# EAGLE board 32blit (EAGLE 9.6.2)
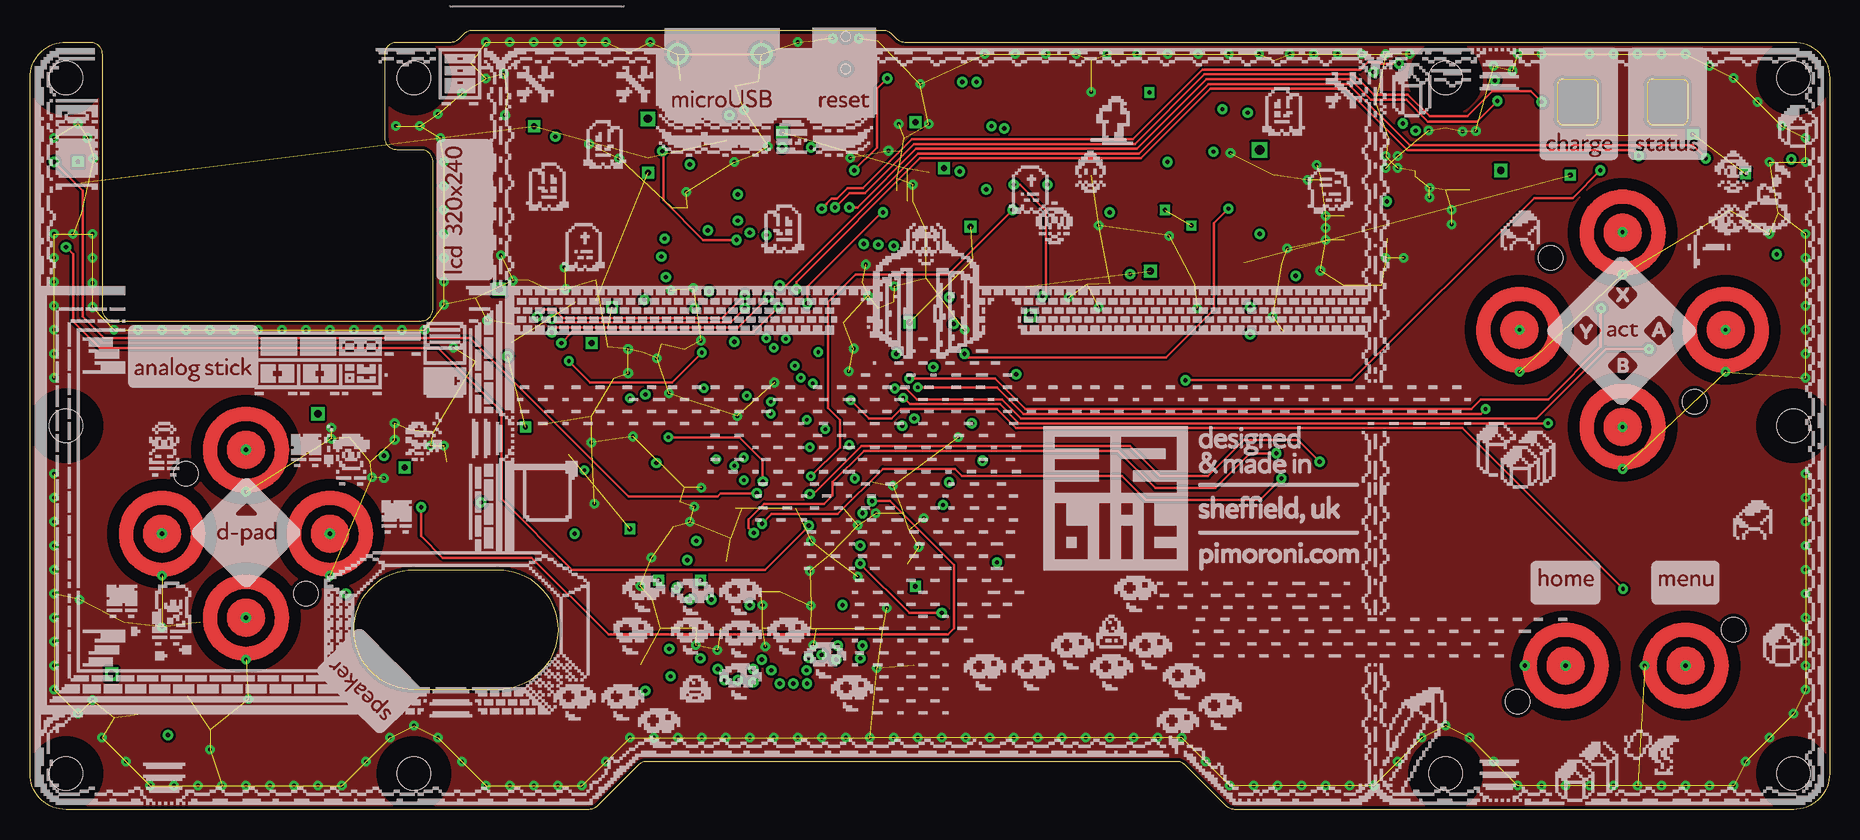
[diagram p0: board, top side]
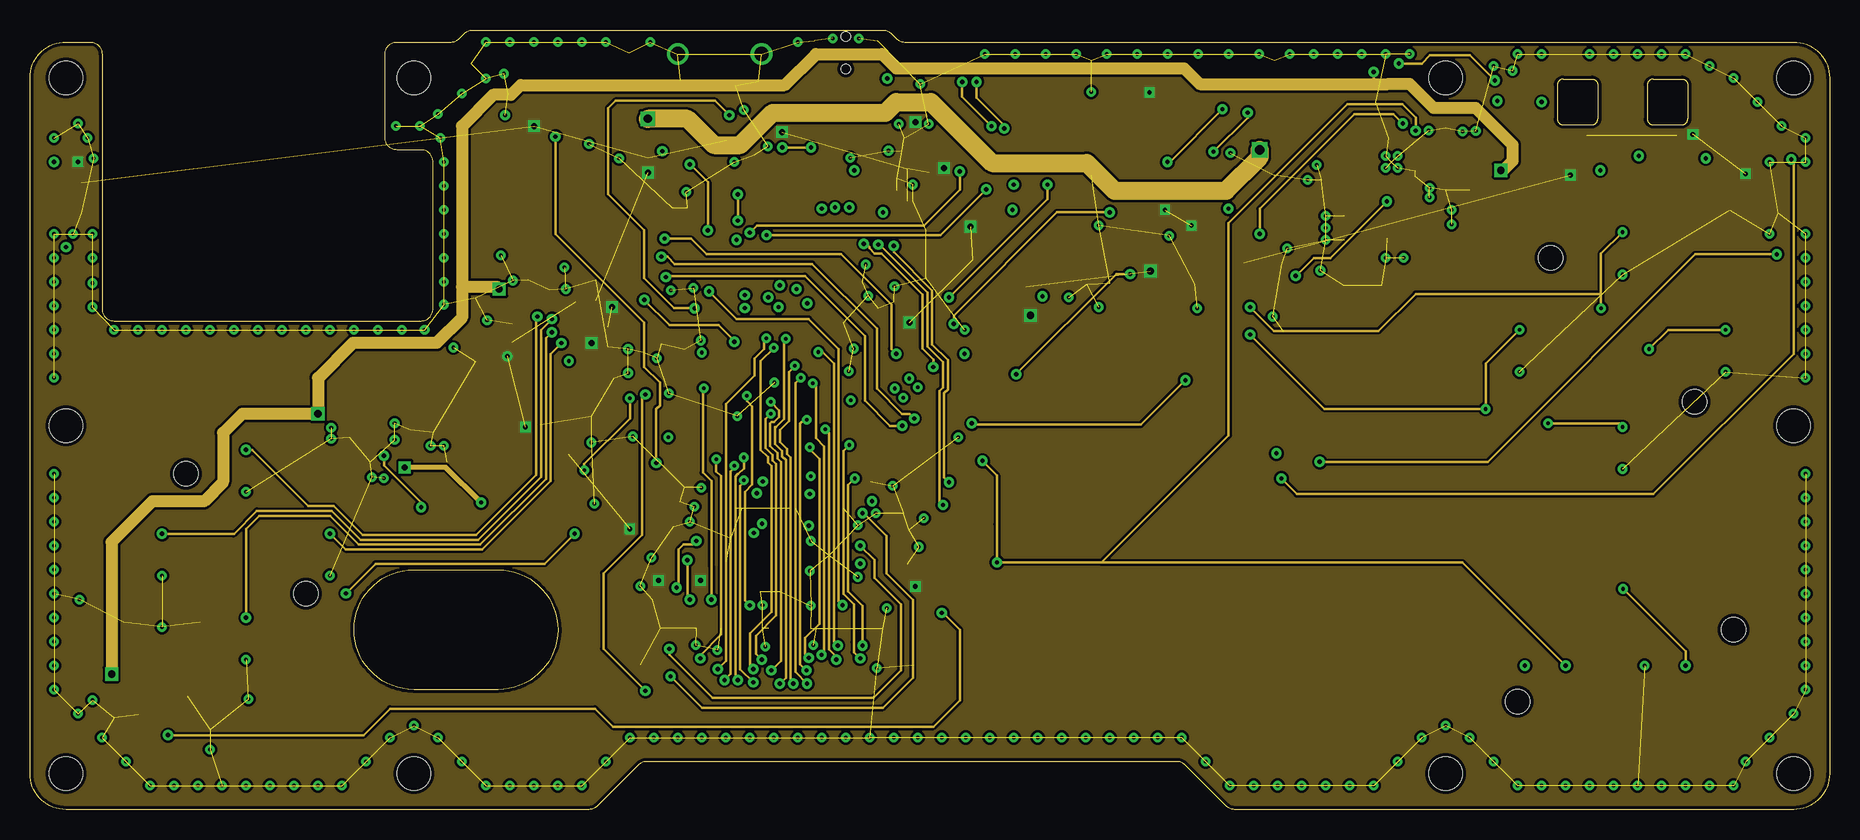
[diagram p1: board, inner layer Route2]
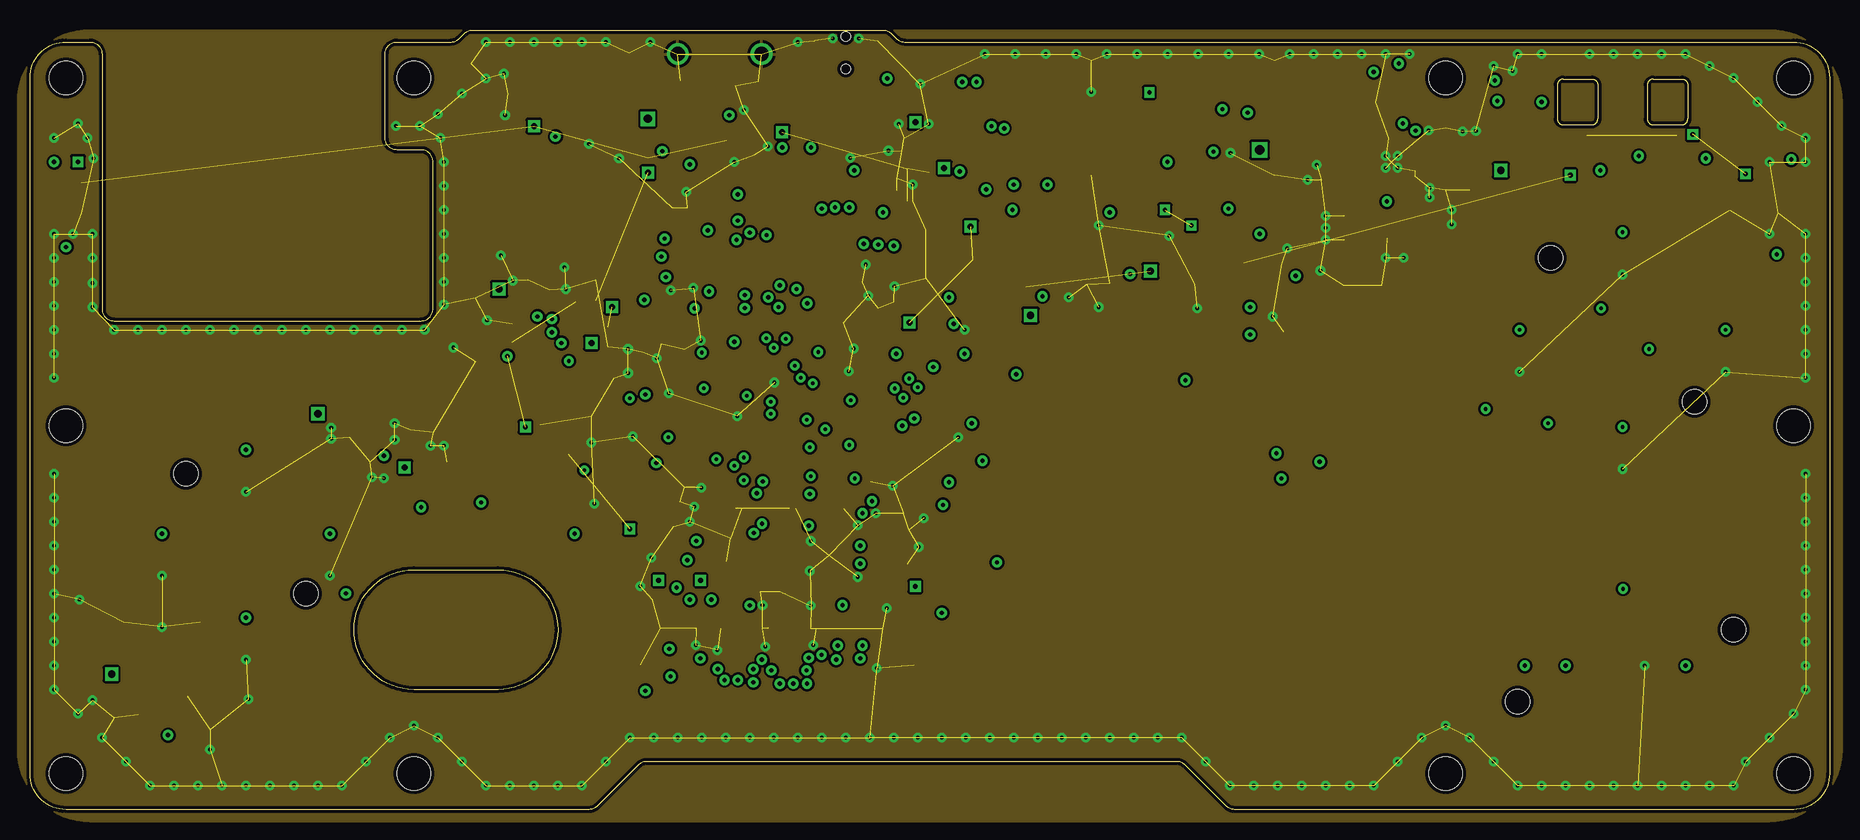
[diagram p2: board, inner layer Route15]
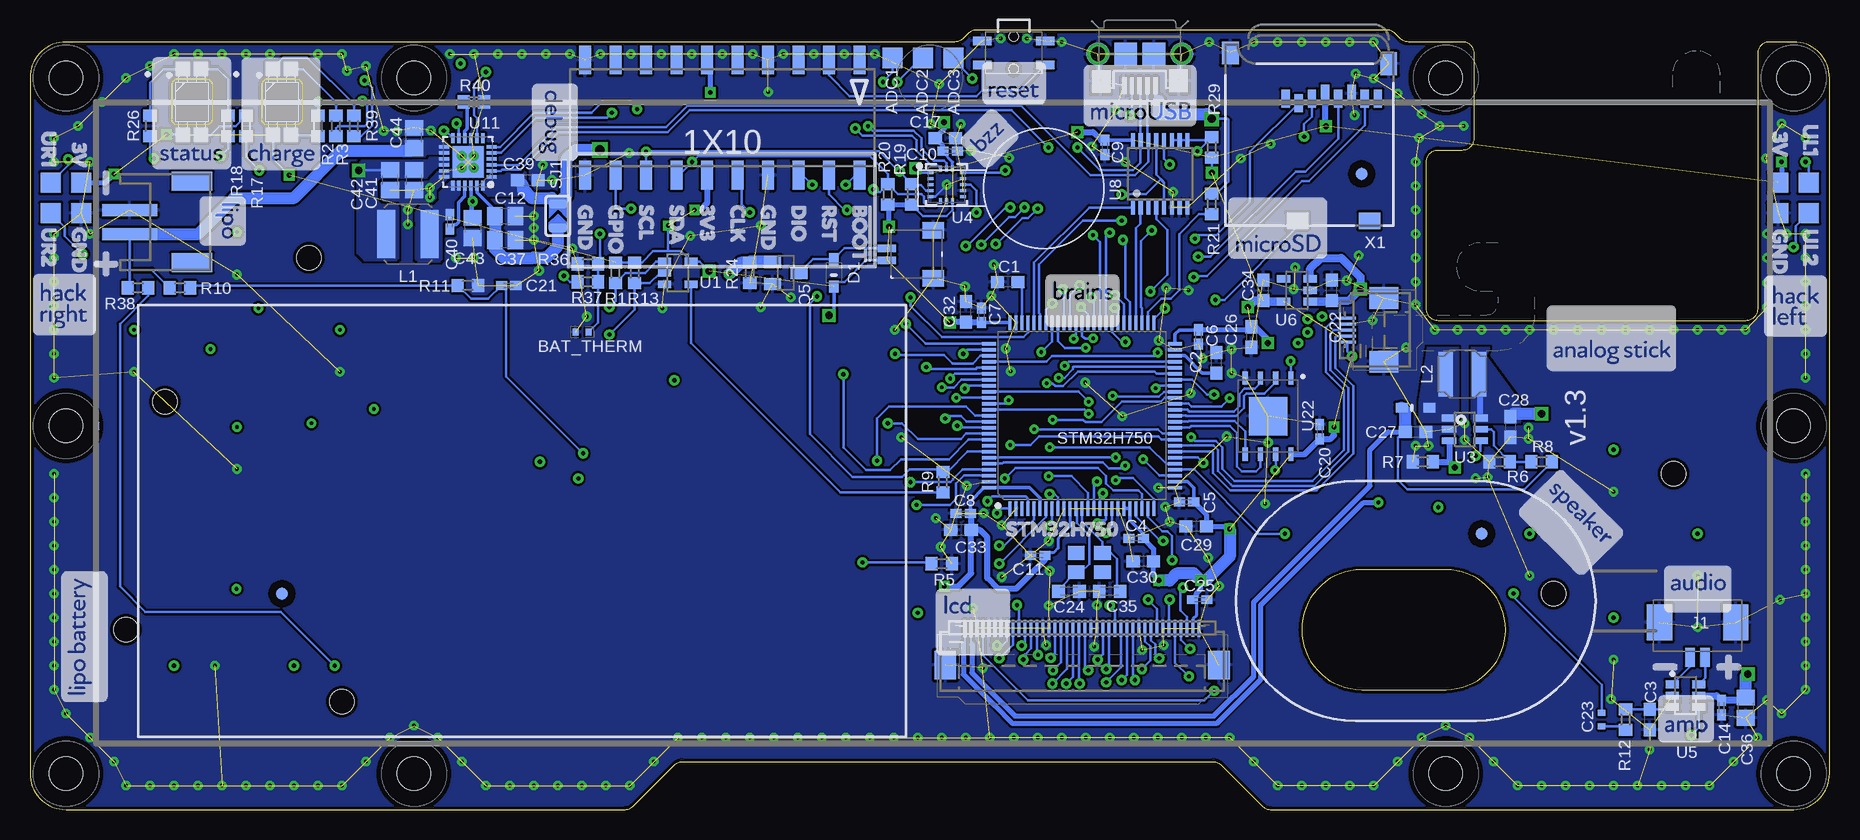
[diagram p3: board, bottom side, seen from below]

Size 150 x 65 mm. Coordinates in mm from the lower left corner, seen from the top.
Outline: 150,61 150,3 arc-90 147,0 100.41,0 arc-45 99.71,0.29 96.29,3.71 arc45 95.59,4 51.41,4 arc45 50.71,3.71 47.29,0.29 arc-45 46.59,0 3,0 arc-90 0,3 0,61 arc-90 3,64 5,64 arc-90 6,63 6,41.75 arc90 7,40.75 32.6,40.75 arc90 33.6,41.75 33.6,54 arc90 32.6,55 30.6,55 arc-90 29.6,56 29.6,63 arc-90 30.6,64 35.09,64 arc45 35.79,64.29 36.21,64.71 arc-45 36.91,65 71.09,65 arc-45 71.79,64.71 72.21,64.29 arc45 72.91,64 147,64 arc-90 150,61
Outline: 39,20 arc-90 44,15 arc-90 39,10 32,10 arc-90 27,15 arc-90 32,20 39,20
Copper layers ((1*2*15*16)): Top 0.035mm / dielectric 1.5mm / Route2 0.035mm / dielectric 0.15mm / Route15 0.035mm / dielectric 0.2mm / Bottom 0.035mm
Design rules "pimoroni-4layer *": minimum track width 0.2mm, minimum drill 0.3mm, track to track 0.2mm, track to pad 0.2mm, pad to pad 0.2mm, via to via 0.2mm, smd to smd 0.15mm, copper to edge 0.3mm, drill to drill 0.15mm, minimum pad ring 0.3mm, minimum via ring 0.25mm, stop-mask expansion 0.05mm, vias tented up to drill 99mm, thermal gap 0.25mm

## Footprints (pad centres in the part's own frame; a part is rotated, then mirrored left to right if it is on the bottom)
ABXY = smd 0.5 x 0.5: A 8.6,0; B 0,-8.1; GND1 -8.6,-3.5; GND2 8.6,-3.5; GND3 0,4.6; GND4 0,-11.6; X 0,8.1; Y -8.6,0 | hole 2: -6,6; 6,-6
TP17SQ = smd 1.7 x 1.7: TP 0,0
0402@1 = smd 0.5 x 0.6: 1 -0.55,0; 2 0.55,0
C0603 = smd 1.1 x 1: 1 -0.85,0; 2 0.85,0
C0402K = smd 0.925 x 0.74: 1 -0.6,0; 2 0.6,0
C0805 = smd 1.3 x 1.5: 1 -0.85,0; 2 0.85,0
0402 = smd 0.5 x 0.6: 1 -0.55,0; 2 0.55,0
C0603K = smd 1.05 x 1.08: 1 -0.875,0; 2 0.875,0
JST-PH-2-SMT-RA = smd 1 x 4.6: 1 1,-3.7; 2 -1,-3.7 | smd 1.6 x 3.4: NC1 -3.4,1.5; NC2 3.4,1.5
SOD-323 = smd 1 x 0.8: A 1.15,0; C -1.15,0
NSR0530HT1G = smd 1 x 0.8: A 1.15,0; C -1.15,0
DPAD = smd 0.5 x 0.5: DOWN 0,-7; GND1 -7,-3.5; GND2 7,-3.5; GND3 0,3.5; GND4 0,-10.5; LEFT -7,0; RIGHT 7,0; UP 0,7 | hole 2: -5,5; 5,-5
FPC-0.5MM-40WAY = smd 0.25 x 1.4: 1 9.75,0.7; 2 9.25,0.7; 3 8.75,0.7; 4 8.25,0.7; 5 7.75,0.7; 6 7.25,0.7; 7 6.75,0.7; 8 6.25,0.7; 9 5.75,0.7; 10 5.25,0.7; 11 4.75,0.7; 12 4.25,0.7; 13 3.75,0.7; 14 3.25,0.7; 15 2.75,0.7; 16 2.25,0.7; 17 1.75,0.7; 18 1.25,0.7; 19 0.75,0.7; 20 0.25,0.7; 21 -0.25,0.7; 22 -0.75,0.7; 23 -1.25,0.7; 24 -1.75,0.7; 25 -2.25,0.7; 26 -2.75,0.7; 27 -3.25,0.7; 28 -3.75,0.7; 29 -4.25,0.7; 30 -4.75,0.7; 31 -5.25,0.7; 32 -5.75,0.7; 33 -6.25,0.7; 34 -6.75,0.7; 35 -7.25,0.7; 36 -7.75,0.7; 37 -8.25,0.7; 38 -8.75,0.7; 39 -9.25,0.7; 40 -9.75,0.7 | smd 1.8 x 2.4: MT1 -11.4,-2.35; MT2 11.4,-2.35
PICOBLADE_1.25MM_2P = smd 0.8 x 1.6: 1 -0.625,0.8; 2 0.625,0.8 | smd 2.1 x 3: MT1 -3.175,-2.1; MT2 3.175,-2.1
JST_SH_1.0MM_2P = smd 0.6 x 1.55: 1 -0.5,4.775; 2 0.5,4.775 | smd 1.4 x 1.8: MT1 -2,0.9; MT2 2,0.9
FPC-0.5MM-05WAY = smd 0.25 x 1.4: 1 1,0.7; 2 0.5,0.7; 3 0,0.7; 4 -0.5,0.7; 5 -1,0.7 | smd 1.8 x 2.4: MT1 -2.65,-2.35; MT2 2.65,-2.35
1X10_FEMALE_SMT_RIGHT_ANGLE = smd 1 x 2.4: A1 -11.43,4.8; A2 -8.89,4.8; A3 -6.35,4.8; A4 -3.81,4.8; A5 -1.27,4.8; A6 1.27,4.8; A7 3.81,4.8; A8 6.35,4.8; A9 8.89,4.8; A10 11.43,4.8; B1 -11.43,-4.8; B2 -8.89,-4.8; B3 -6.35,-4.8; B4 -3.81,-4.8; B5 -1.27,-4.8; B6 1.27,-4.8; B7 3.81,-4.8; B8 6.35,-4.8; B9 8.89,-4.8; B10 11.43,-4.8
NRS5030 = smd 1.5 x 4: 1 -1.8,0; 2 1.8,0
NR4018 = smd 1.2 x 3.7: 1 -1.4,0; 2 1.4,0
SOT23 = smd 1 x 1.4: 1 -0.95,-1.1; 2 0.95,-1.1; 3 0,1.1
R0603 = smd 1 x 1.1: 1 -0.85,0; 2 0.85,0
LED-6028_REVERSE_RGB = smd 1.2 x 1.2: 1 -2.75,-0.75; 2 2.75,-0.75; 3 2.75,0.75; 4 -2.75,0.75
SOLDERJUMPER_ARROW_NOPASTE = smd 0.762 x 1.524: 1 -1.016,0; 2 1.016,0
LQFP-100 = smd 0.26 x 1.2: 1 -6,-7.75; 2 -5.5,-7.75; 3 -5,-7.75; 4 -4.5,-7.75; 5 -4,-7.75; 6 -3.5,-7.75; 7 -3,-7.75; 8 -2.5,-7.75; 9 -2,-7.75; 10 -1.5,-7.75; 11 -1,-7.75; 12 -0.5,-7.75; 13 0,-7.75; 14 0.5,-7.75; 15 1,-7.75; 16 1.5,-7.75; 17 2,-7.75; 18 2.5,-7.75; 19 3,-7.75; 20 3.5,-7.75; 21 4,-7.75; 22 4.5,-7.75; 23 5,-7.75; 24 5.5,-7.75; 25 6,-7.75; 51 6,7.75; 52 5.5,7.75; 53 5,7.75; 54 4.5,7.75; 55 4,7.75; 56 3.5,7.75; 57 3,7.75; 58 2.5,7.75; 59 2,7.75; 60 1.5,7.75; 61 1,7.75; 62 0.5,7.75; 63 0,7.75; 64 -0.5,7.75; 65 -1,7.75; 66 -1.5,7.75; 67 -2,7.75; 68 -2.5,7.75; 69 -3,7.75; 70 -3.5,7.75; 71 -4,7.75; 72 -4.5,7.75; 73 -5,7.75; 74 -5.5,7.75; 75 -6,7.75 | smd 1.2 x 0.26: 26 7.75,-6; 27 7.75,-5.5; 28 7.75,-5; 29 7.75,-4.5; 30 7.75,-4; 31 7.75,-3.5; 32 7.75,-3; 33 7.75,-2.5; 34 7.75,-2; 35 7.75,-1.5; 36 7.75,-1; 37 7.75,-0.5; 38 7.75,0; 39 7.75,0.5; 40 7.75,1; 41 7.75,1.5; 42 7.75,2; 43 7.75,2.5; 44 7.75,3; 45 7.75,3.5; 46 7.75,4; 47 7.75,4.5; 48 7.75,5; 49 7.75,5.5; 50 7.75,6; 76 -7.75,6; 77 -7.75,5.5; 78 -7.75,5; 79 -7.75,4.5; 80 -7.75,4; 81 -7.75,3.5; 82 -7.75,3; 83 -7.75,2.5; 84 -7.75,2; 85 -7.75,1.5; 86 -7.75,1; 87 -7.75,0.5; 88 -7.75,0; 89 -7.75,-0.5; 90 -7.75,-1; 91 -7.75,-1.5; 92 -7.75,-2; 93 -7.75,-2.5; 94 -7.75,-3; 95 -7.75,-3.5; 96 -7.75,-4; 97 -7.75,-4.5; 98 -7.75,-5; 99 -7.75,-5.5; 100 -7.75,-6
TACT_RIGHT_ANGLE_LOW_PROFILE = smd 1.55 x 0.7: 1 -2.625,1; 2 2.625,1; 3 -2.625,-1; 4 2.625,-1 | hole 0.8: 0,1.35; 0,-1.35
SOT-23-5 = smd 0.65 x 1.1: 1 0.95,1.1; 2 0,1.1; 3 -0.95,1.1; 4 -0.95,-1.1; 5 0.95,-1.1
SOT23-6L = smd 0.55 x 1.2: 1 -0.95,-1.3; 2 0,-1.3; 3 0.95,-1.3; 4 0.95,1.3; 5 0,1.3; 6 -0.95,1.3
LGA16_3X3MM = smd 0.5 x 0.25: 1 -1.35,1; 2 -1.35,0.5; 3 -1.35,0; 4 -1.35,-0.5; 5 -1.35,-1; 9 1.35,-1; 10 1.35,-0.5; 11 1.35,0; 12 1.35,0.5; 13 1.35,1 | smd 0.25 x 0.5: 6 -0.5,-1.35; 7 0,-1.35; 8 0.5,-1.35; 14 0.5,1.35; 15 0,1.35; 16 -0.5,1.35
SOT-23-6 = smd 0.65 x 1.1: 1 0.95,1.1; 2 0,1.1; 3 -0.95,1.1; 4 -0.95,-1.1; 5 0,-1.1; 6 0.95,-1.1
TSSOP-16-TI = smd 1.2 x 0.35: 1 -2.808,2.275; 2 -2.808,1.625; 3 -2.808,0.975; 4 -2.808,0.325; 5 -2.808,-0.325; 6 -2.808,-0.975; 7 -2.808,-1.625; 8 -2.808,-2.275; 9 2.795,-2.275; 10 2.795,-1.625; 11 2.795,-0.975; 12 2.795,-0.325; 13 2.795,0.325; 14 2.795,0.975; 15 2.795,1.625; 16 2.795,2.275
QFN50P400X400X100-25N = smd 0.813 x 0.305: 1 -1.981,1.245; 2 -1.981,0.762; 3 -1.981,0.254; 4 -1.981,-0.254; 5 -1.981,-0.762; 6 -1.981,-1.245; 13 1.981,-1.245; 14 1.981,-0.762; 15 1.981,-0.254; 16 1.981,0.254; 17 1.981,0.762; 18 1.981,1.245 | smd 0.305 x 0.813: 7 -1.245,-1.981; 8 -0.762,-1.981; 9 -0.254,-1.981; 10 0.254,-1.981; 11 0.762,-1.981; 12 1.245,-1.981; 19 1.245,1.981; 20 0.762,1.981; 21 0.254,1.981; 22 -0.254,1.981; 23 -0.762,1.981; 24 -1.245,1.981 | smd 2.591 x 2.591: 25 -0.025,0
DFN-8_6X5MM = smd 1.1 x 0.45: 1 -3.175,1.905; 2 -3.175,0.635; 3 -3.175,-0.635; 4 -3.175,-1.905; 5 3.175,-1.905; 6 3.175,-0.635; 7 3.175,0.635; 8 3.175,1.905 | smd 3.2 x 3.2: PAD 0,0
MICROB-USB = smd 0.35 x 1.4: DM -0.65,2.65; DP 0,2.65; GND 1.3,2.65; ID 0.65,2.65; VBUS -1.3,2.65 | smd 1.546 x 1.9: SH1 -3.251,2.235; SH2 3.226,2.286 | drill 1.2 pad 1.6: SH3 3.48,0; SH8 -3.505,0 | smd 1.9 x 1.9: SH4 3.48,0; SH5 1.168,0; SH6 -1.194,0; SH7 -3.505,0
2.7MM-MOUNTING-HOLE = hole 2.75: 0,0
FIDUCIAL-1MM = smd 1 x 1: 1 0,0
MENU-HOME = smd 0.5 x 0.5: GND3 0,1.6; GND4 0,-8.4; HOME 0,-5; MENU 0,5 | hole 2: -3,9; 3,-9
TSX-3225 = smd 1.4 x 1.15: 1 -1.1,-0.8; 2 1.1,-0.8; 3 1.1,0.8; 4 -1.1,0.8
MICROSD = smd 0.7 x 1.5: 1 9,-10.64; 2 7.9,-10.24; 3 6.8,-10.64; 4 5.7,-11.04; 5 4.6,-10.64; 6 3.5,-11.04; 7 2.4,-10.64; 8 1.3,-10.64 | smd 1.8 x 1.4: CD1 2,-0.44; CD2 8,-0.44 | smd 1.4 x 1.9: MT1 0.4,-13.54; MT2 13.6,-14.44

## Placement (x,y rotation side)
ABXY  ABXY  [ABXY]  132.75,40 0 top
ADC1  TPTP17SQ  [TP17SQ]  78.11,62.66 270 bottom
ADC2  TPTP17SQ  [TP17SQ]  75.56,62.66 270 bottom
ADC3  TPTP17SQ  [TP17SQ]  73.03,62.66 270 bottom
BAT_THERM  NTCG103JF103FT1  [0402@1]  103.97,39.82 0 bottom
C1  2.2uF  [C0603]  68.5,44 180 bottom
C2  2.2uF  [C0603]  51.1,37.25 90 bottom
C3  100pF  [C0603]  15,7.5 270 bottom
C4  100nF  [C0402K]  57.8,22.6 180 bottom
C5  100nF  [C0402K]  53.6,25.65 180 bottom
C6  100nF  [C0402K]  52.6,39.4 270 bottom
C7  100nF  [C0402K]  70.7,41.2 90 bottom
C8  100nF  [C0402K]  72.2,24.7 180 bottom
C9  100nF  [C0402K]  60.4,55.2 270 bottom
C10  100nF  [C0402K]  73.3,54.9 0 bottom
C11  100nF  [C0402K]  66,21.2 180 bottom
C12  10uF  [C0805]  110.4,49.5 0 bottom
C14  100nF  [C0402K]  9,8.5 270 bottom
C17  2.2uF  [C0603]  73.7,56 0 bottom
C20  100nF  [C0402K]  42.5,31.5 90 bottom
C21  100nF  [C0402K]  110.1,43.7 0 bottom
C22  1uF  [C0603]  41.5,43.3 90 bottom
C23  100nF  [0402]  19,7.5 90 bottom
C24  10pF  [C0603K]  63.4,18.2 180 bottom
C25  100nF  [C0402K]  52.5,17.5 0 bottom
C26  1uF  [C0603]  48.2,39.4 270 bottom
C27  1uF 25V  [C0603]  34.5,31.5 0 bottom
C28  1uF  [C0603]  26.6,31.9 270 bottom
C29  1uF  [C0603]  52.8,23.6 180 bottom
C30  1uF  [C0603]  57.2,20.7 180 bottom
C32  1uF  [C0603]  72,41.5 90 bottom
C33  1uF  [C0603]  72.4,23.3 180 bottom
C34  1uF  [C0603]  47.2,43.3 90 bottom
C35  10pF  [C0603K]  60,18.2 0 bottom
C36  10uF  [C0805]  7,8.5 270 bottom
C37  10uF  [C0805]  110.4,47.5 0 bottom
C39  1uF  [C0603]  108.5,52.5 0 bottom
C40  100nF  [C0402K]  115,49 270 bottom
C41  10uF  [C0805]  118,52.5 270 bottom
C42  10uF  [C0805]  120,52.5 270 bottom
C43  10uF  [C0805]  113.1,48.5 270 bottom
C44  10uF  [C0805]  118,56 90 bottom
CN1  LIPO BATTERY  [JST-PH-2-SMT-RA]  138,49 270 bottom
D1  NSR0530HT1G  [SOD-323]  83,44.75 90 bottom
D2  NSR0530HT1G  [NSR0530HT1G]  34.5,33.5 0 bottom
DPAD  DPAD  [DPAD]  18,23 0 top
FPC2  FPC-40WAY0.5  [FPC-0.5MM-40WAY]  62.3,14.4 0 bottom
J1  1X02PICOBLADE  [PICOBLADE_1.25MM_2P]  11,13.5 180 bottom
J3  1X02JST_SH  [JST_SH_1.0MM_2P]  73.8,46.3 90 bottom
JOYSTICK  FLIP_TYPE_0.5_5P  [FPC-0.5MM-05WAY]  39.5,40 90 bottom
JP1  10-WAY  [1X10_FEMALE_SMT_RIGHT_ANGLE]  92.3,57.7 0 bottom
L1  NRS5030T1R0NMGJ  [NRS5030]  118.5,48 180 bottom
L2  NR4018T4R7M  [NR4018]  30.6,36.3 180 bottom
Q5  DMN3023L  [SOT23]  87,44.75 270 bottom
R1  100k  [R0603]  101.2,44.75 90 bottom
R2  1k  [R0603]  126,57 270 bottom
R3  1k  [R0603]  124.5,57 90 bottom
R5  10k  [R0603]  74,20.5 0 bottom
R6  47K  [R0603]  27.5,29 0 bottom
R7  13.7R  [R0603]  33.9,29 0 bottom
R8  20K  [R0603]  24,29 0 bottom
R9  1k  [R0603]  73.9,27.3 90 bottom
R10  1M  [R0603]  137.5,43.5 0 bottom
R11  1M  [R0603]  113.5,43.7 0 bottom
R12  430k  [R0603]  17,7.5 90 bottom
R13  100k  [R0603]  99.6,44.75 90 bottom
R17  1k  [R0603]  132,57 270 bottom
R18  1k  [R0603]  133.5,57 270 bottom
R19  10k  [R0603]  76.5,51.3 270 bottom
R20  10k  [R0603]  78.5,51.3 270 bottom
R21  10k  [R0603]  51.5,50.5 270 bottom
R24  100k  [R0603]  90,44.75 270 bottom
R26  1k  [R0603]  140,57 270 bottom
R29  100k  [R0603]  51.5,55.2 270 bottom
R36  39k  [R0603]  103.5,45.5 0 bottom
R37  4k7  [R0603]  103.5,44 180 bottom
R38  4k7  [R0603]  141,43.5 180 bottom
R39  1k  [R0603]  123,57 270 bottom
R40  390R  [R0603]  113,59 180 bottom
RGB1  LED_RGB_4P6028_REVERSE  [LED-6028_REVERSE_RGB]  129,59 270 bottom
RGB2  LED_RGB_4P6028_REVERSE  [LED-6028_REVERSE_RGB]  136.5,59 270 bottom
SJ1  [SOLDERJUMPER_ARROW_NOPASTE]  106,49.5 90 bottom
STM32H750  [LQFP-100]  62.31,32.84 0 bottom
SWRESET  LY-A03-02  [TACT_RIGHT_ANGLE_LOW_PROFILE]  68,63.1 180 bottom
U1  SN74AHC1G02  [SOT-23-5]  96,44.75 90 bottom
U3  AP3031KTR-G1 - ref 200mV  [SOT23-6L]  30.4,31.7 270 bottom
U4  [LGA16_3X3MM]  73.6,52.1 0 bottom
U5  PAM8301  [SOT-23-6]  12,9.5 90 bottom
U6  AP2112  [SOT-23-5]  44.4,43.3 270 bottom
U8  74VHC4053AFT  [TSSOP-16-TI]  55.8,53 90 bottom
U11  BQ24295  [QFN50P400X400X100-25N]  113.5,54 180 bottom
U22  MT25QL256ABA1EW7-0SIT  [DFN-8_6X5MM]  46.8,32.8 270 bottom
U$2  [LRA_ELV1030AC1]  65.5,51.8 180 bottom
U$3  FCI 10118193-0001LF  [MICROB-USB]  57.5,63 180 bottom
U$6  [2.7MM-MOUNTING-HOLE]  3,61 0 top
U$7  [LCD_035]  75,0 0 top
U$8  [2.7MM-MOUNTING-HOLE]  32,61 0 top
U$9  [2.7MM-MOUNTING-HOLE]  118,61 0 top
U$10  [2.7MM-MOUNTING-HOLE]  147,61 0 top
U$11  [2.7MM-MOUNTING-HOLE]  147,3 0 top
U$12  [2.7MM-MOUNTING-HOLE]  118,3 0 top
U$13  [2.7MM-MOUNTING-HOLE]  32,3 0 top
U$14  [2.7MM-MOUNTING-HOLE]  3,3 0 top
U$15  [3020_SPEAKER]  34.5,17.4 0 bottom
U$16  [2.7MM-MOUNTING-HOLE]  3,32 0 top
U$17  FIDUCIAL1MM  [FIDUCIAL-1MM]  29,23 0 bottom
U$18  HOME-MENU  [MENU-HOME]  133,12 270 top
U$19  ABM8G-12.000MHZ-4Y-T3  [TSX-3225]  61.7,20.6 180 bottom
U$20  [2.7MM-MOUNTING-HOLE]  147,32 0 top
U$21  [JOYSTICK_ANALOG]  18.1,51.25 0 top
U$22  FIDUCIAL1MM  [FIDUCIAL-1MM]  39,53 0 bottom
U$23  FIDUCIAL1MM  [FIDUCIAL-1MM]  129,18 0 bottom
USER_3V3_1  TPTP17SQ  [TP17SQ]  4.27,52.27 0 bottom
USER_3V3_2  TPTP17SQ  [TP17SQ]  145.73,52.27 0 bottom
USER_GND_1  TPTP17SQ  [TP17SQ]  4.27,49.73 0 bottom
USER_GND_2  TPTP17SQ  [TP17SQ]  145.73,49.73 0 bottom
USER_LEFT1  TPTP17SQ  [TP17SQ]  1.73,52.27 0 bottom
USER_LEFT2  TPTP17SQ  [TP17SQ]  1.73,49.73 0 bottom
USER_RIGHT1  TPTP17SQ  [TP17SQ]  148.27,52.27 0 bottom
USER_RIGHT2  TPTP17SQ  [TP17SQ]  148.27,49.73 0 bottom
X1  MicroSD  [MICROSD]  36.35,48.65 180 bottom

## Library data of the parts
ABXY DPAD SWRESET U$2 U$15 U$18 U$21 = pimoroni-mechanical
ADC1-ADC3 USER_3V3_1 USER_3V3_2 USER_GND_1 USER_GND_2 USER_LEFT1 USER_LEFT2 USER_RIGHT1 USER_RIGHT2 = testpad
BAT_THERM C23 = 0201_0402
C1-C3 C10 C12 C14 C17 C22 C26-C30 C32-C34 C36 C37 C39 C41-C44 R1-R3 R5-R13 R17-R21 R24 R26 R29 R36-R40 = resistor
C4-C9 C11 C20 C21 C24 C25 C35 C40 = rcl; SPICEPREFIX: C
CN1 = adafruit
D1 D2 L1 L2 Q5 U$19 = pimoroni-passives
FPC2 JOYSTICK = pimoroni-fpc
J1 J3 U$3 = pimoroni-connectors
JP1 = pimoroni-headers
RGB1 RGB2 U$7 = pimoroni-optoelectronics
SJ1 = microbuilder; BOM: EXCLUDE
STM32H750 U1 U5 U6 U8 U22 = pimoroni-ics
U3 U4 = edits
U11 = edits; MPN: BQ24610RGER; OC_FARNELL: -; OC_NEWARK: 63R9861; PACKAGE: VQFN-24; SUPPLIER: Texas Instruments
U$6 U$8-U$14 U$16 U$20 = pimoroni-misc
U$17 U$22 U$23 = pimoroni
X1 = microbuilder

## Nets
3V3: C4.1 C5.1 C6.1 C7.1 C8.1 C9.1 C10.1 C11.1 C17.1 C20.1 C25.1 C26.1 C29.1 C30.1 C32.1 C33.1 C34.1 D1.C FPC2.2 J3.1 JOYSTICK.5 JP1.A5 JP1.B5 R1.2 R13.2 R19.2 R20.2 R29.2 RGB1.2 RGB2.2 STM32H750.6 STM32H750.11 STM32H750.20 STM32H750.21 STM32H750.27 STM32H750.50 STM32H750.75 STM32H750.100 U1.5 U4.1 U4.8 U4.14 U6.5 U8.16 U22.8 USER_3V3_1.TP USER_3V3_2.TP X1.4
48_VCAP: C2.1 STM32H750.48
73_VCAP: C1.1 STM32H750.73
!AMP_SD: STM32H750.7 U5.4
!RESET: JP1.A9 JP1.B9 STM32H750.14 SWRESET.1 SWRESET.2
ACCEL_INT: STM32H750.69 U4.11
AJOY_BUTTON: JOYSTICK.3 STM32H750.33
AJOY_LR: JOYSTICK.4 STM32H750.32
AJOY_UD: JOYSTICK.1 STM32H750.15
BATSENSE: C21.1 R10.2 R11.1 STM32H750.18
BOOT0: JP1.A10 JP1.B10 R9.2 STM32H750.94
DAC_AUDIO_OUT: C23.2 STM32H750.29
DPAD_DOWN: DPAD.DOWN STM32H750.61
DPAD_LEFT: DPAD.LEFT STM32H750.57
DPAD_RIGHT: DPAD.RIGHT STM32H750.62
DPAD_UP: DPAD.UP STM32H750.56
EXTENSION_GPIO: JP1.A2 JP1.B2 STM32H750.78
FLASH_CS: STM32H750.79 U22.1
FLASH_D0: STM32H750.37 U22.5
FLASH_D1: STM32H750.38 U22.2
FLASH_D2: STM32H750.39 U22.3
FLASH_D3: STM32H750.40 U22.7
FLASH_SCK: STM32H750.36 U22.6
GND: ABXY.GND1 ABXY.GND2 ABXY.GND3 ABXY.GND4 BAT_THERM.1 C1.2 C2.2 C3.2 C4.2 C5.2 C6.2 C7.2 C8.2 C9.2 C10.2 C11.2 C12.2 C14.2 C17.2 C20.2 C21.2 C22.2 C24.1 C25.2 C26.2 C27.2 C28.2 C29.2 C30.2 C32.2 C33.2 C34.2 C35.1 C36.2 C37.2 C39.2 C41.2 C42.2 C43.2 C44.2 CN1.2 DPAD.GND1 DPAD.GND2 DPAD.GND3 DPAD.GND4 FPC2.1 FPC2.7 FPC2.11 FPC2.18 FPC2.19 FPC2.26 FPC2.27 FPC2.34 FPC2.35 FPC2.36 FPC2.38 FPC2.MT1 FPC2.MT2 J1.MT1 J1.MT2 J3.MT1 J3.MT2 JOYSTICK.2 JOYSTICK.MT1 JOYSTICK.MT2 JP1.A1 JP1.A7 JP1.B1 JP1.B7 Q5.2 R5.2 R6.1 R7.1 R11.2 R24.2 R36.1 R40.1 STM32H750.2 STM32H750.10 STM32H750.19 STM32H750.26 STM32H750.49 STM32H750.74 STM32H750.99 SWRESET.3 SWRESET.4 U1.3 U3.2 U4.5 U4.7 U4.10 U4.12 U5.2 U6.2 U8.6 U8.7 U8.8 U11.9 U11.17 U11.18 U11.25 U22.4 U22.PAD U$3.GND U$3.SH1 U$3.SH2 U$3.SH3 U$3.SH4 U$3.SH5 U$3.SH6 U$3.SH7 U$3.SH8 U$18.GND3 USER_GND_1.TP USER_GND_2.TP X1.6 X1.MT1 X1.MT2
I2C_SCL: JP1.A3 JP1.B3 R19.1 STM32H750.59 U4.4 U11.5
I2C_SDA: JP1.A4 JP1.B4 R20.1 STM32H750.60 U4.6 U11.6
LCD_B2: FPC2.17 STM32H750.87
LCD_B3: FPC2.16 STM32H750.67
LCD_B4: FPC2.15 STM32H750.42
LCD_B5: FPC2.14 STM32H750.25
LCD_B6: FPC2.13 STM32H750.95
LCD_B7: FPC2.12 STM32H750.96
LCD_BACKLIGHT_EN: STM32H750.4 U3.4
LCD_CLK: FPC2.37 STM32H750.44
LCD_CS: FPC2.3 STM32H750.22
LCD_DE: FPC2.8 STM32H750.43
LCD_G2: FPC2.25 STM32H750.30
LCD_G3: FPC2.24 STM32H750.41
LCD_G4: FPC2.23 STM32H750.46
LCD_G5: FPC2.22 STM32H750.47
LCD_G6: FPC2.21 STM32H750.64
LCD_G7: FPC2.20 STM32H750.84
LCD_HSYNC: FPC2.10 STM32H750.63
LCD_R2: FPC2.33 STM32H750.23
LCD_R3: FPC2.32 STM32H750.34
LCD_R4: FPC2.31 U8.4
LCD_R5: FPC2.30 STM32H750.68
LCD_R6: FPC2.29 STM32H750.35
LCD_R7: FPC2.28 STM32H750.45
LCD_RESET: FPC2.6 STM32H750.24
LCD_SPI_MOSI: FPC2.4 STM32H750.5
LCD_SPI_SCLK: FPC2.5 STM32H750.1
LCD_VSYNC: FPC2.9 STM32H750.28
LED_BLUE: R17.2 STM32H750.91
LED_CHG_BLUE: R2.1 STM32H750.98
LED_CHG_GREEN: R3.1 STM32H750.97
LED_CHG_RED: R39.2 STM32H750.80
LED_GREEN: R18.2 STM32H750.66
LED_RED: R26.2 STM32H750.65
LEDA: C27.1 D2.C FPC2.39 R8.2
LEDK: FPC2.40 R7.2 U3.3
N$1: R9.1 U1.4
N$2: R21.2 STM32H750.52
N$3: D2.A L2.2 U3.1
N$4: ADC3.TP U4.13
N$5: C3.1 R12.2 U5.3
N$6: R18.1 RGB2.4
N$7: R17.1 RGB2.3
N$8: C23.1 R12.1
N$9: ADC2.TP U4.15
N$10: ADC1.TP U4.16
N$11: R2.2 RGB1.3
N$12: R3.2 RGB1.4
N$14: D1.A J3.2 Q5.3
N$16: R39.1 RGB1.1
N$17: R26.1 RGB2.1
N$26: R6.2 R8.1 U3.5
N$43: R40.2 U11.10
N$44: C40.2 U11.21
N$45: BAT_THERM.2 R36.2 R37.1 U11.11
N$47: R38.1 U$18.GND4
N$50: C40.1 L1.1 U11.19 U11.20
N$937591: C12.1 C37.1 SJ1.1 U11.23
OUT+: J1.1 U5.6
OUT-: J1.2 U5.1
REGN: C43.1 R37.2 U11.22
SD_CS: STM32H750.77 X1.2
SD_DETECT: STM32H750.58 X1.CD2
SD_SPI_MISO: STM32H750.90 X1.7
SD_SPI_MOSI: STM32H750.31 X1.3
SD_SPI_SCLK: STM32H750.89 X1.5
SWA: ABXY.A STM32H750.83
SWB: ABXY.B STM32H750.85
SWCLK: JP1.A6 JP1.B6 STM32H750.76
SWDIO: JP1.A8 JP1.B8 STM32H750.72
SWHOME: R5.1 STM32H750.88 U11.12 U$18.HOME
SWMENU: STM32H750.86 U$18.MENU
SWX: ABXY.X R1.1 STM32H750.81 U1.1
SWY: ABXY.Y R13.1 STM32H750.82 U1.2
USB_5V: C39.1 R21.1 SJ1.2 U11.1 U11.24 U$3.VBUS
USB_DFU_DM: STM32H750.70 U8.5 U8.13
USB_DFU_DP: STM32H750.71 U8.1
USB_DM: U8.14 U11.3 U$3.DM
USB_DP: U8.15 U11.2 U$3.DP
USB_ID: STM32H750.51 U$3.ID
USB_MAIN_DM: STM32H750.53 U8.12
USB_MAIN_DP: STM32H750.54 U8.2
USB_SWAP: R29.1 STM32H750.55 U8.9 U8.10 U8.11
USER_LEFT1: STM32H750.16 USER_LEFT1.TP
USER_LEFT2: STM32H750.8 USER_LEFT2.TP
USER_RIGHT1: STM32H750.17 USER_RIGHT1.TP
USER_RIGHT2: STM32H750.9 USER_RIGHT2.TP
VBAT: C44.1 CN1.1 R10.1 R38.2 U11.13 U11.14
VCC: C14.1 C22.1 C28.1 C36.1 C41.1 C42.1 L1.2 L2.1 U3.6 U5.5 U6.1 U6.3 U11.8 U11.15 U11.16
VIBE_EN: Q5.1 R24.1 STM32H750.92
XTAL_IN: C24.2 STM32H750.12 U$19.3
XTAL_OUT: C35.2 STM32H750.13 U$19.1

## Tracks (layer width: path | path; a pad name or v marks a point on that pad's centre or on a via)
3V3  (via drill 0.35, 0.4, 0.5, 0.6)  (19 unrouted)
  Bottom 0.2: R1.2 R13.2 99,45.6 98.05,46.55 96.8,46.55 | 96.8,46.55 95.75,46.55 U1.5 94.2,45.7 v93.4,44.9 | 96.8,46.55 v96.8,48.7 | RGB2.2 137.3,56.3 v138.6,56.3 | v51.5,53.1 R29.2 | J3.1 80.3,45.8 82.1,44 82.8,44 83,43.8 D1.C | JP1.A5 93.55,62.48 93.3,62.48 | R19.2 75.55,49.5 73.6,49.5 73.1,50 U4.8 | U4.1 75.6,53.1 76,53.5 v76.2,53.5 | JOYSTICK.5 40.2,38.2 v39.8,37.8 | RGB1.2 129.75,54.25 v128.4,52.9
  Bottom 0.25: STM32H750.11 63.31,23.59 64.3,22.6 64.3,21.8 64.7,21.4 65.2,21.4 C11.1 | FPC2.2 53.05,15.89 52.75,16.19 52.75,17.15 C25.1 | U4.14 73.1,54 73.9,54.8 C10.1
  Bottom 0.3: STM32H750.20 STM32H750.21 58.31,24.11 57.2,23 C4.1 | STM32H750.6 65.81,25.96 66.69,26.84 STM32H750.100 70.46,26.84 71.6,25.7 C8.1 | C5.1 53,26.8 53.54,27.34 STM32H750.27 | C6.1 54.2,40 54.56,39.63 STM32H750.50 | C7.1 70.69,40.59 STM32H750.75 | U8.16 C9.1 | v83.4,41.2 83,41.6 D1.C
  Bottom 0.4: v50,23.4 50.2,23.6 C29.1 51.95,24.6 C5.1 | 93.3,62.48 v93.3,59.8 | C26.1 48.45,40 C6.1 | C4.1 56.67,22.07 56.67,22.06 56.35,21.73 C30.1 56.35,19.55 v55.9,19.1 | C25.1 52.76,17.84 52.76,18.04 52.4,18.4 v52.4,19.1 | USER_3V3_2.TP 143.73,52.27 v143,53 | v4,54 4,52.54 USER_3V3_1.TP | v78.4,48.6 78.4,50.35 R20.2 R19.2 | v73.8,57.3 73.8,56.75 C17.1 73.9,55.35 C10.1
  Bottom 0.45: U22.8 43.77,29.62 C20.1
  Bottom 0.5: C11.1 65.4,20.8 67.8,18.4 69.3,18.4 70.2,19.3 70.2,22.7 70.8,23.3 C33.1 | C26.1 47.85,40.25 46.8,39.2 v46.8,38.9 | C20.1 41.6,30.9 41.3,31.2 v41.3,31.9 | C7.1 71.95,40.6 C32.1 73.25,40.65 v73.3,40.6 | JP1.B5 93.57,50.55 94.12,50 v94.6,50 | C8.1 71.55,24.65 C33.1 | X1.4 42.05,57.05 v42,57 | v73.8,18.6 72.65,18.6 71.55,19.7 C33.1 | v62.7,56.5 61.4,56.5 60.7,55.8 C9.1
  Bottom 0.7: U6.5 47.1,42.35 C34.1 47.95,42.45 v48.5,41.9
  Bottom 1: v50,23.4 50,21.1 52,19.1 v52.4,19.1 53,19.7 54.31,19.7 54.33,19.68 54.42,19.68 55,19.1 v55.9,19.1
  pour Route2 (rank 5): 145,-1 5,-1 arc-90 -1,5 -1,59 arc-90 5,65 145,65 arc-90 151,59 151,5 arc-90
48_VCAP
  Bottom 0.3: STM32H750.48 53.74,37.84 52.3,36.4 C2.1
73_VCAP
  Bottom 0.2: STM32H750.73 67.31,43.66 C1.1
!AMP_SD  (via drill 0.35)
  Top 0.2: v76,16.4 73.3,16.4 v69.2,20.5
  Route2 0.2: v11.5,6.2 27.8,6.2 30,8.4 47.1,8.4 48.6,6.9 75.3,6.9 77.5,9.1 77.5,15 76.1,16.4 v76,16.4
  Bottom 0.2: U5.4 10.9,6.8 v11.5,6.2 | STM32H750.7 65.31,24.39 v69.2,20.5
!RESET  (via drill 0.3, 0.35)
  Top 0.2: v65.1,27.8 67.5,30.2 67.5,32.5 66.5,33.5 66.5,42.3 68.8,44.6 76.5,44.6 v81.9,50
  Bottom 0.2: STM32H750.14 61.81,26.41 63.2,27.8 v65.1,27.8 | JP1.A9 83.41,61.21 81.7,59.5 71.12,59.5 70.62,60 | v81.9,50 82.1,50 83.41,51.31 JP1.B9 | 70.62,60 SWRESET.2 | SWRESET.1 67.47,60 70.62,60
ACCEL_INT  (via drill 0.35)
  Top 0.2: v64.8,42.2 64.8,43.6 71,49.8 v71.1,49.8
  Bottom 0.2: STM32H750.69 65.31,41.69 v64.8,42.2 | v71.1,49.8 71.1,51.6 71.6,52.1 U4.11
AJOY_BUTTON
  Bottom 0.2: STM32H750.33 51.34,30.34 51,30 51,28.23 49.88,27.12 | 49.88,27.12 49.77,27 | 49.88,27.12 49.77,27 | 49.77,27 42.93,27 40.1,29.83 40.1,35.17 41.6,36.67 | 41.6,36.67 | 41.6,36.67 41.6,39.7 41.3,40 JOYSTICK.3
AJOY_LR
  Bottom 0.2: STM32H750.32 51.44,29.84 51.4,29.8 51.4,28.07 49.93,26.6 | 49.93,26.6 | 49.93,26.6 42.77,26.6 39.7,29.67 39.7,35.33 41.2,36.83 41.2,39.4 41.1,39.5 JOYSTICK.4
AJOY_UD  (via drill 0.3, 0.35)
  Top 0.2: v61.08,27.36 61.08,29.12 59.16,31.04 v53.2,31.04
  Bottom 0.2: v53.2,31.04 52.9,30.74 51.14,30.74 50.6,30.2 50.6,28.4 49.6,27.4 43.1,27.4 40.5,30 40.5,35 41.5,36 42,36.5 42,40.2 41.2,41 JOYSTICK.1 | v61.08,27.36 61.31,27.12 STM32H750.15
BATSENSE  (via drill 0.35)
  Top 0.2: v60.33,23.05 59.9,23.48 59.9,24.2 61.2,25.5 66.2,25.5 66.9,26.2 66.9,27.3 69.5,29.9 90.7,29.9 93.8,26.8 98.8,26.8 101.7,29.7 v103.9,29.7
  Bottom 0.2: STM32H750.18 59.81,23.56 v60.33,23.05 | R10.2 136.45,43.7 R11.1 113.25,42.6 111.8,42.6 C21.1 110.3,43.3 110.3,36.1 v103.9,29.7
BOOT0  (via drill 0.35)
  Top 0.2: v84.4,42.8 84.7,43.1 84.7,49.9 82.5,52.1 v82,52.1
  Bottom 0.2: STM32H750.94 71.86,29.84 73.5,28.2 73.85,28.2 R9.2 74.1,28.35 76.7,28.35 77.3,27.75 81.45,27.75 85,31.3 85,42.2 v84.4,42.8 | JP1.B10 81.2,52.9 v82,52.1
DAC_AUDIO_OUT  (via drill 0.35)
  Route2 0.2: v26.34,18.03 28.81,20.5 42.9,20.5 v45.4,23
  Bottom 0.2: STM32H750.29 52.94,28.34 47.6,23 v45.4,23 | C23.2 19,10.39 26.34,17.73 v26.34,18.03
DPAD_DOWN  (via drill 0.35)
  Top 0.2: v61.54,42.7 59.04,40.2 43.9,40.2 v43.5,39.8
  Route2 0.2: DPAD.DOWN 18,23.4 19.1,24.5 25,24.5 27.4,22.1 37.53,22.1 43,27.57 43,39.3 v43.5,39.8
  Bottom 0.2: STM32H750.61 61.31,42.48 v61.54,42.7
  other vias: 18,16
DPAD_LEFT  (via drill 0.35)
  Top 0.2: v59.59,41.81 58.38,40.6 43.8,40.6 v43.5,40.9
  Route2 0.2: DPAD.LEFT 16.9,23 17,23 18.9,24.9 25.17,24.9 27.57,22.5 37.37,22.5 42.6,27.73 42.6,40 v43.5,40.9
  Bottom 0.2: STM32H750.57 59.31,41.54 v59.59,41.81
  other vias: 11,23
DPAD_RIGHT  (via drill 0.35)
  Top 0.2: v62.4,41.9 60.3,39.8 45.2,39.8 v44.3,38.9
  Route2 0.2: DPAD.RIGHT 26.3,21.7 37.7,21.7 43.4,27.4 43.4,38 v44.3,38.9
  Bottom 0.2: STM32H750.62 61.81,41.31 v62.4,41.9
  other vias: 25,23
DPAD_UP  (via drill 0.35)
  Top 0.2: v59.59,42.9 57.69,41 44.42,41 43.73,41.7 42.9,41.7 v42.3,41.1
  Route2 0.2: DPAD.UP 18.5,30 23.2,25.3 25.33,25.3 27.73,22.9 37.2,22.9 42.2,27.9 42.2,41 v42.3,41.1
  Bottom 0.2: STM32H750.56 58.81,42.12 v59.59,42.9
  other vias: 18,30
EXTENSION_GPIO  (via drill 0.35)
  Top 0.2: v77.9,38 78.2,37.7 94.7,37.7 98.7,41.7 98.7,48.9 v99.9,50.1
  Bottom 0.2: STM32H750.78 70.76,37.84 71.39,37.2 73.11,37.2 73.8,37.9 77.8,37.9 v77.9,38 | JP1.B2 101.19,50.1 v99.9,50.1
FLASH_CS  (via drill 0.3)
  Top 0.2: v56,38.1 53.5,35.6 46.7,35.6 v44.9,37.4
  Bottom 0.2: STM32H750.79 65.26,37.34 64.8,37.8 56,37.8 v56,38.1 | v44.9,37.4 U22.1
FLASH_D0
  Bottom 0.2: STM32H750.37 53.46,32.34 53.4,32.4 49.8,32.4 | 49.8,32.4 | 49.8,32.4 49.6,32.4 48.7,31.5 U22.5
FLASH_D1
  Bottom 0.2: STM32H750.38 53.64,32.84 53.6,32.8 49.5,32.8 48.8,33.5 48.8,34.5 48.6,34.7 47.1,34.7 46.16,35.63 U22.2
FLASH_D2
  Bottom 0.2: STM32H750.39 53.54,33.34 53.4,33.2 49.67,33.2 49.2,33.67 49.2,34.67 48.77,35.1 47.9,35.1 47.44,35.56 U22.3
FLASH_D3  (via drill 0.3)
  Route2 0.2: v46.2,28.3 46.2,28.8 50,32.6 v50,34.3
  Bottom 0.2: STM32H750.40 53.44,33.84 53.2,33.6 50.7,33.6 v50,34.3 | U22.7 46.16,28.34 v46.2,28.3
FLASH_SCK
  Bottom 0.2: STM32H750.36 53.36,31.84 53.2,32 50,32 49.4,31.4 49.4,28.6 49,28.2 47.8,28.2 47.44,28.57 U22.6
GND  (via drill 0.3)  (396 unrouted)
  Bottom 0.2: v73.6,52.1 73.6,52.05 74.55,51.1 U4.5
  other vias: 6,6 55,24 49.85,36.4 50.86,18.64 74.5,24.3 68.66,38.44 4.11,17.51 38.1,40.8 39.25,46.2 49.85,38.4 34.5,30.32 33.4,30.32 51.8,21 124.15,36.5 132.75,28.4 141.35,36.5 132.75,44.6 18,26.5 11,19.5 18,12.5 25,19.5 65.3,13.7 70.6,11.8 35.3,38.52 61.3,13.6 68.26,36.54 55.9,39.1 52.26,37.64 55.96,26.84 55.36,25.24 61.06,17.04 71.92,26.99 134.6,12 50.25,31.1 46.8,30.6 47.05,25.5 69,19.4 53.25,34.7 97.3,41.8 62.05,35.6 58.95,32.8 65,19.9 65.1,17 103.6,41.1 11.01,15.21 5.21,9.11 4,57.2 77.9,40 77.36,31.04 94.96,47.84 30.4,32.22 30.4,30.82 114,54.5 113,54.5 113,53.5 114,53.5 57.3,13.3 55.5,13.7 71.4,16.8 104.8,46.8 106.5,52.5 120.52,56.59 116.66,51.84 118.5,50 113,46 114.5,46 107.26,53.74 116.66,51.04 108,49.5 108,48.5 108,47.5 107.56,44.94 118.5,48.8 88.46,59.84 39.5,61.35 89.1,48.7 89.1,41.9 86.6,42.7 69.66,45.44 59.5,58.33 39.6,57.9 55.3,43.5 69.86,42.84 2,56 2,48 2,46 2,44 2,42 2,40 2,38 2,36 2,28 2,26 2,24 2,22 2,20 2,18 2,16 2,14 2,12 2,10 4,8 8,4 10,2 12,2 14,2 16,2 18,2 20,2 22,2 24,2 26,2 28,4 32,7 30,6 34,6 36,4 38,2 40,2 42,2 44,2 46,2 48,4 50,6 52,6 54,6 56,6 58,6 60,6 62,6 64,6 66,6 68,6 70,6 72,6 74,6 76,6 78,6 80,6 82,6 84,6 86,6 88,6 90,6 92,6 94,6 96,6 98,4 100,2 102,2 104,2 106,2 108,2 110,2 112,2 114,4 116,6 120,6 118,7 122,4 124,2 126,2 128,2 130,2 132,2 134,2 136,2 138,2 140,2 142,2 143,4 145,6 147,8 148,10 148,12 148,14 148,16 148,18 148,20 148,22 148,24 148,26 148,28 148,36 148,38 148,40 148,42 148,44 148,46 148,48 148,54 148,56 146,57 144,59 142,61 140,62 138,63 136,63 134,63 132,63 130,63 126,63 124,63 122,62 123.6,61.6 119.42,56.54 115,63 113,63 111,63 109,63 107,63 105,63 102.46,63 99.92,63 97.38,63 94.84,63 92.3,63 89.76,63 87.22,63 84.68,63 82.14,63 79.6,63 100.06,54.74 69.1,64.3 66.9,64.3 64,64 51.7,64 48,64 46,64 44,64 42,64 40,64 38,64 36,59.7 38,60.95 34,58 34.2,56 30.5,57 34.5,54 34.5,52 34.5,50 34.5,48 34.5,46 34.5,44 31,40 29,40 27,40 25,40 23,40 21,40 19,40 17,40 15,40 13,40 11,40 9,40 7,40 5.2,43.9 5.2,46 5.2,48 5.3,54.3 4.8,56 58.7,54 61.5,55.3 74.1,21.9 72.06,43.64 71.56,54.94 70.5,24.7 3.6,48 145,48 145,54 53.4,43.3 65.1,22.4 34.5,42.1 18.2,9.2 25.1,31.82 25.1,30.92 28.5,27.72 29.5,27.62 54.7,51.5 40.25,44.1 44.55,45.2 44.65,43.4 32.9,40 32.5,57 49.1,54.3 46.6,55.5 5.2,41.9 15,5 69,23.7 68.36,54.34 72.41,57.16 74.2,60.5 74.91,57.16 116.58,56.61
  pour Top: 145,-1 5,-1 arc-90 -1,5 -1,59 arc-90 6,66 144,66 arc-90 151,59 151,5 arc-90
  pour Route15 (isolate 0.2): 145,-1 5,-1 arc-90 -1,5 -1,59 arc-90 5,65 145,65 arc-90 151,59 151,5 arc-90
  pour Bottom (rank 2): 145,-1 5,-1 arc-90 -1,5 -1,59 arc-90 5,65 145,65 arc-90 151,59 151,5 arc-90
  pour Bottom (rank 3, no thermals): 25,26.5 36.5,26.5 36.5,38.5 36.5,39 24.5,39 24.5,26.5
  pour Bottom (rank 3, no thermals): 123,60 106,60 106,42 123,42
I2C_SCL  (via drill 0.35)
  Route2 0.2: v101.5,58.1 101.5,57.7 v98.65,54.85 | v60,48.1 60.6,48.7 74.5,48.7 77.5,51.7 v77.5,53.2
  Bottom 0.2: JP1.B3 v98.65,54.85 98.65,54.65 98.4,54.9 79.25,54.9 77.55,53.2 v77.5,53.2 77.5,53.15 R19.1 76.4,52.05 75.75,52.05 75.3,51.6 U4.4 | U11.5 110.74,54.76 107.8,57.7 101.9,57.7 v101.5,58.1 | STM32H750.59 60.31,47.78 v60,48.1
I2C_SDA  (via drill 0.35)
  Route2 0.2: v99.4,58.4 95,54 v94.81,54 | v61.4,47.9 75.9,47.9 v79.7,51.7
  Bottom 0.2: R20.1 77.65,51.3 75.7,51.3 75.5,51.1 75.5,50.6 75.2,50.3 74.55,50.3 U4.6 | R20.1 78.5,53 80,54.5 94.31,54.5 v94.81,54 95.91,52.9 JP1.B4 | U11.6 110.82,55.24 107.97,58.1 103.2,58.1 102.3,59 100,59 v99.4,58.4 | STM32H750.60 60.81,47.31 v61.4,47.9 | R20.1 79.15,51.5 79.5,51.5 v79.7,51.7
LCD_B2  (via drill 0.3, 0.35)
  Route2 0.2: v61.75,33 61.3,32.55 61.3,30.15 61.9,29.55 61.9,29.1 62.2,28.8 62.2,16.2 60.5,14.5 60.5,13 v61,12.5
  Bottom 0.2: STM32H750.87 62.09,33.34 v61.75,33 | v61,12.5 60.55,12.95 FPC2.17
LCD_B3  (via drill 0.3, 0.35)
  Route2 0.2: v62,38.5 60.9,37.4 60.9,29.98 61.5,29.38 61.5,28.94 61.8,28.64 61.8,16.5 60,14.7 60,12 v60.3,11.7
  Bottom 0.2: v62,38.5 63.75,38.5 64.31,39.06 STM32H750.67 | v60.3,11.7 60.05,11.95 FPC2.16
LCD_B4  (via drill 0.3, 0.35)
  Route2 0.2: v59.75,34.5 59.75,34.05 60.2,33.6 60.2,27.1 59.6,26.5 59.6,17.43 v60,17.02
  Bottom 0.2: v59.75,34.5 59.67,34.42 55.88,34.42 55.48,34.82 54.59,34.82 STM32H750.42 | STM32H750.42 | FPC2.15 59.55,16.57 v60,17.02
LCD_B5  (via drill 0.3, 0.35)
  Route2 0.2: v59.5,27.45 59.5,27.3 59.2,27 59.2,19 | 59.2,19 | 59.2,19 59.2,11.7 v60.3,10.6
  Bottom 0.2: STM32H750.25 56.31,25.91 58.05,27.65 59.3,27.65 v59.5,27.45 | v60.3,10.6 59.05,11.85 FPC2.14
LCD_B6  (via drill 0.3, 0.35)
  Route2 0.2: v59.5,29.35 59.5,28.45 59.01,27.96 58.99,27.96 58.8,27.77 58.8,11 v59,10.8
  Bottom 0.2: STM32H750.95 59.51,29.34 v59.5,29.35 | v59,10.8 58.55,11.25 FPC2.13
LCD_B7  (via drill 0.3, 0.35)
  Route2 0.2: v58.72,28.66 58.72,28.52 58.4,28.2 58.4,11.3 v57.9,10.8
  Bottom 0.2: v58.72,28.66 58.94,28.44 60.06,28.44 60.56,28.94 68.86,28.94 68.97,28.84 STM32H750.96 | v57.9,10.8 58.05,10.95 FPC2.12
LCD_BACKLIGHT_EN  (via drill 0.35)
  Top 0.2: v32.6,25.2 32.6,22.8 34.4,21 41.83,21 48.23,14.6 76.5,14.6 77,15.1 77,20.4 71.69,25.71 v70.19,25.71
  Route2 0.2: v29.5,29.5 29.5,28.7 32.6,25.6 v32.6,25.2
  Bottom 0.2: U3.4 29.1,29.9 v29.5,29.5 | STM32H750.4 66.81,25.91 67,26.1 69.8,26.1 v70.19,25.71
LCD_CLK  (via drill 0.35)
  Route2 0.2: v51.3,34.6 51,34.3 51,22.9 47.8,19.7 47.8,13.4 v51.3,9.9
  Bottom 0.2: FPC2.37 70.55,12.85 66.8,9.1 52.1,9.1 v51.3,9.9 | STM32H750.44 53.14,35.84 51.9,34.6 v51.3,34.6
LCD_CS  (via drill 0.35)
  Route2 0.2: v55.55,22.4 55.27,22.12 54.5,22.12 54.08,21.7 54.08,18.68 v53.9,18.5
  Bottom 0.2: v55.55,22.4 55.77,22.4 57.81,24.45 STM32H750.22 | FPC2.3 53.55,16.05 54.1,16.6 54.1,18.3 v53.9,18.5
LCD_DE  (via drill 0.3, 0.35)
  Route2 0.2: v56.17,35.12 56.1,35.05 56.1,28.1 56.8,27.4 56.8,24.2 56.8,20.3 v56.8,17.5
  Bottom 0.2: v56.17,35.12 55.95,35.34 STM32H750.43 | v56.8,17.5 56.05,16.75 FPC2.8
LCD_G2  (via drill 0.3, 0.35)
  Route2 0.2: v65,30.2 65,30.02 65.8,29.22 65.8,17.1 | 65.8,17.1 | 65.8,17.1 65.8,15.5 64.6,14.3 64.6,12.97 v64.92,12.65
  Bottom 0.2: v65,30.2 56.68,30.2 55.29,28.81 54.59,28.81 STM32H750.30 | v64.92,12.65 64.55,13.03 FPC2.25
LCD_G3  (via drill 0.3, 0.35)
  Route2 0.2: v64.75,32.5 64.5,32.5 64.2,32.2 64.2,12.12 v64.72,11.6
  Bottom 0.2: v64.75,32.5 62.24,32.5 62.04,32.3 60.7,32.3 58.98,34.02 55.71,34.02 55.4,34.34 STM32H750.41 | STM32H750.41 | v64.72,11.6 64.05,12.28 FPC2.24
LCD_G4  (via drill 0.3, 0.35)
  Route2 0.2: v64.25,36 63.8,35.55 63.8,11.47 v64.78,10.5
  Bottom 0.2: v64.25,36 63.76,36 63.05,36.71 63.05,36.89 63,36.94 55.32,36.94 55.29,36.91 54.63,36.91 STM32H750.46 | v64.78,10.5 63.55,11.72 FPC2.23
LCD_G5  (via drill 0.3, 0.35)
  Route2 0.2: v63.75,37 63.25,36.5 63.25,32.38 62.5,31.63 62.5,30.64 63.1,30.04 63.1,29.65 63.4,29.35 63.4,10.72 v63.62,10.5
  Bottom 0.2: STM32H750.47 63.41,37.34 v63.75,37 | STM32H750.47 | v63.75,37 | v63.62,10.5 63.05,11.07 FPC2.22
LCD_G6  (via drill 0.3, 0.35)
  Route2 0.2: v63,39.25 62.85,39.1 62.85,32.54 62.21,31.9 62.1,31.9 62.1,30.48 62.7,29.88 62.7,29.43 63,29.13 63,11 v62.5,10.5
  Bottom 0.2: STM32H750.64 62.81,39.44 v63,39.25 | v62.5,10.5 62.55,10.55 FPC2.21
LCD_G7  (via drill 0.3, 0.35)
  Route2 0.2: v61.75,34 v61.75,33.99 62.45,33.29 62.45,32.71 62.04,32.3 61.8,32.3 61.7,32.2 61.7,30.31 62.3,29.71 62.3,29.27 62.6,28.97 62.6,12.4 v61.8,11.6
  Bottom 0.2: v61.75,34 62.59,34.84 STM32H750.84 | v61.8,11.6 62.05,11.85 FPC2.20
LCD_HSYNC  (via drill 0.3, 0.35)
  Route2 0.2: v61.37,39.28 61.35,39.26 61.35,39.2 61.2,39.05 61.2,38.4 60.4,37.6 60.4,36.2 58,33.8 58,12.38 v57.33,11.71
  Bottom 0.2: v61.37,39.28 62.08,39.28 62.3,39.5 62.3,39.54 62.31,39.55 STM32H750.63 | FPC2.10 57.05,14.04 56.6,13.59 56.6,12.44 v57.33,11.71
LCD_R2  (via drill 0.3, 0.35)
  Route2 0.2: v68.75,27.6 68.2,27.05 68.2,18.2 69.4,17 v69.4,13.68
  Bottom 0.2: v68.75,27.6 67.85,28.5 61,28.5 60.3,27.8 60.3,27.2 59.7,26.6 57.6,26.6 57.31,26.32 STM32H750.23 | v69.4,13.68 68.92,13.68 68.55,14.05 FPC2.33
LCD_R3  (via drill 0.3, 0.35)
  Route2 0.2: v68.3,30.4 67.8,29.9 67.8,18 68.7,17.1 68.7,14 68.67,13.97 68.67,13.12 v69.2,12.6
  Bottom 0.2: v68.3,30.4 66.61,30.4 65.91,31.1 55.95,31.1 55.69,30.84 STM32H750.34 | v69.2,12.6 68.05,13.75 FPC2.32
LCD_R4  (via drill 0.35)
  Route2 0.2: v67.72,17.05 67.4,17.38 67.4,38.4 64.9,40.9 58.9,40.9 v56.6,43.2
  Bottom 0.2: FPC2.31 67.55,16.88 v67.72,17.05 | v56.6,43.2 55.2,44.6 55.2,48.3 56.12,49.23 U8.4
LCD_R5  (via drill 0.3, 0.35)
  Route2 0.2: v65.7,38.15 66.05,38.15 67,37.2 67,14 v67.33,13.68
  Bottom 0.2: STM32H750.68 64.81,39.03 v65.7,38.15 | v67.33,13.68 67.05,13.95 FPC2.30
LCD_R6  (via drill 0.3, 0.35)
  Route2 0.2: v66.3,31.7 66.6,31.4 66.6,13.38 67.2,12.78 v67.2,12.5
  Bottom 0.2: v66.3,31.7 55.98,31.7 55.62,31.34 STM32H750.35 | STM32H750.35 | v67.2,12.5 67.2,12.8 67.05,12.95 67.03,12.95 66.55,13.43 FPC2.29
LCD_R7  (via drill 0.3, 0.35)
  Route2 0.2: v65.25,35.54 v65.25,35.55 65.5,35.3 65.5,30.99 66.2,30.29 66.2,13.12 v65.97,12.9
  Bottom 0.2: v65.25,35.54 64.78,35.54 64.54,35.3 63.89,35.3 62.66,36.54 56.29,36.54 56.09,36.34 STM32H750.45 | v65.97,12.9 66.05,12.97 FPC2.28
LCD_RESET  (via drill 0.35)
  Route2 0.2: v54.8,20.8 54.8,17.7 v55,17.5
  Bottom 0.2: STM32H750.24 56.81,24.41 55.6,23.2 55.2,23.2 54.8,22.8 v54.8,20.8 | FPC2.6 55.05,17.45 v55,17.5
LCD_SPI_MOSI  (via drill 0.35)
  Route2 0.2: v69.2,22 70.4,20.8 70.4,19.3 72.6,17.1 72.6,11.6 70.3,9.3 56.9,9.3 53.3,12.9 v53.3,13.4
  Bottom 0.2: FPC2.4 54.05,14.15 v53.3,13.4 | STM32H750.5 66.31,24.18 66.6,23.9 66.9,23.9 68.8,22 v69.2,22
LCD_SPI_SCLK  (via drill 0.35)
  Route2 0.2: v53.4,11.1 56,8.5 71.1,8.5 73.6,11 73.6,17.5 71.4,19.7 71.4,22.8 69.5,24.7 v69.4,24.7
  Bottom 0.2: FPC2.5 54.55,12.25 v53.4,11.1 | STM32H750.1 69.01,25.09 v69.4,24.7
LCD_VSYNC  (via drill 0.3, 0.35)
  Route2 0.2: v57.2,29.2 57.2,28.2 57.6,27.8 57.6,14.6 55.88,12.88 v55.88,12.6
  Bottom 0.2: v57.2,29.2 55.84,27.84 STM32H750.28 | v55.88,12.6 56.2,12.93 56.2,13.76 56.55,14.11 FPC2.9
LED_BLUE  (via drill 0.35)
  Top 0.2: v96.3,35.8 110.2,35.8 125.4,51 128.6,51 v130.9,53.3
  Route2 0.2: v96.3,35.8 92.6,32.1 78.6,32.1 v78.5,32.2
  Bottom 0.2: STM32H750.91 71.96,31.34 72.4,30.9 76,30.9 77.3,32.2 v78.5,32.2 | v130.9,53.3 132,54.4 R17.2
LED_CHG_BLUE  (via drill 0.35)
  Top 0.2: v67.1,50.2 68.3,51.4 69.6,51.4 73.7,55.5 92.1,55.5 97.9,61.3 110.3,61.3 112,59.6 114.88,59.6 116.67,57.8 119.8,57.8 121.9,59.9 125.1,59.9 v126,59
  Route2 0.2: v76.1,25.4 75.8,25.7 75.8,34.9 76.1,35.2 76.1,37.3 74.8,38.6 74.8,43.1 70.8,47.1 v70.7,47.1
  Bottom 0.2: R2.1 v126,59 | STM32H750.98 72.16,27.84 72.8,27.2 72.8,25.9 73.3,25.4 v76.1,25.4 | v70.7,47.1 68.4,49.4 67.9,49.4 v67.1,50.2
LED_CHG_GREEN  (via drill 0.35)
  Top 0.2: v68.3,50.2 68.97,50.2 73.87,55.1 92.27,55.1 98.07,60.9 110.07,60.9 111.77,59.2 114.71,59.2 116.53,57.38 120.6,57.38 v122.3,59.08
  Route2 0.2: v72,47 72,46.47 75.2,43.27 75.2,38.77 76.5,37.47 76.5,35.03 76.2,34.73 76.2,27.7 v76.6,27.3
  Bottom 0.2: R3.1 124.5,56.8 124.3,57 122.1,57 121.9,57.2 121.9,58.67 v122.3,59.08 | STM32H750.97 72.26,28.34 73.05,27.55 73.05,27.53 73.28,27.3 v76.6,27.3 | v72,47 71.9,47 68.7,50.2 v68.3,50.2
LED_CHG_RED  (via drill 0.35)
  Top 0.2: v66,50.1 66.38,50.48 66.38,50.5 66.8,50.92 67.26,50.92 68.13,51.8 69.44,51.8 73.54,55.9 91.94,55.9 97.74,61.7 110.9,61.7 111.5,62.3 112.5,62.3 112.6,62.2 v114.1,62.2
  Route2 0.2: v75.3,36.9 75.3,37.53 74.4,38.43 74.4,42.93 70.96,46.38 70.4,46.38 69.97,46.8 69.97,46.9 69.7,47.17 v69.5,47.17 | v122.1,60.8 120,62.9 116.7,62.9 116,62.2 v114.1,62.2
  Bottom 0.2: STM32H750.80 71.06,36.84 71.16,36.74 75.14,36.74 v75.3,36.9 | v66,50.1 66.8,49.3 67.28,49.3 69.4,47.17 v69.5,47.17 | R39.2 122.38,56.15 121.5,57.03 121.5,60.2 v122.1,60.8
LED_GREEN  (via drill 0.35)
  Top 0.2: v134.1,54.5 133.6,55 114.8,55 109.7,60.1 98.4,60.1 92.6,54.3 74.2,54.3 63.9,44 v63.9,43.4
  Bottom 0.2: v134.1,54.5 133.5,55.1 R18.2 | v63.9,43.4 63.81,43.31 STM32H750.66
LED_RED  (via drill 0.35)
  Top 0.2: v139.7,54.3 138.6,55.4 115,55.4 109.9,60.5 98.23,60.5 92.43,54.7 74.03,54.7 63.03,43.7 v62.5,43.7
  Bottom 0.2: v139.7,54.3 140,54.6 R26.2 | STM32H750.65 63.31,42.88 v62.5,43.7
LEDA
  Bottom 0.2: C27.1 35.52,31.5 36,31.02 36,27.5 35.2,26.7 25.45,26.7 R8.2 | FPC2.39 71.55,13.85 71.5,13.8
  Bottom 0.4: 71.5,13.8 71.5,11.4 67.9,7.8 51.3,7.8 48,11.1 48,17.3 38.3,27 38.3,30 36.8,31.5 C27.1
  Bottom 1: C27.1 35.35,33.2 D2.C
LEDK  (via drill 0.35, 0.5)
  Route2 0.4: v37.6,25.6 34.66,28.54 v31.24,28.54
  Bottom 0.2: FPC2.40 72.05,13.95 72.2,13.8
  Bottom 0.4: 72.2,13.8 72.2,11.25 69.62,8.68 68.15,7.2 51.05,7.2 47.4,10.85 47.4,17.05 38.85,25.6 v37.6,25.6
  Bottom 0.5: U3.3 31.7,29 | 31.7,29 v31.24,28.54 | R7.2 31.7,29
N$1
  Bottom 0.2: U1.4 94.9,38.9 82.45,26.45 R9.1
N$2
  Bottom 0.2: STM32H750.52 56.81,41.48 55.7,42.6 54.9,42.6 54.2,43.3 54.2,44.5 | 54.2,44.5 | 54.2,44.5 54.2,48 52.55,49.65 R21.2
N$3
  pour Bottom (no thermals): 31,32.3 31,38.5 33.5,38.5 34.2,33.9 34.2,32.3
N$4  (via drill 0.35)
  Top 0.2: v68.7,53.3 70.6,55.2 70.6,60.1 v71.45,60.95
  Bottom 0.2: v68.7,53.3 68.9,53.1 U4.13 | v71.45,60.95 73.03,62.52 ADC3.TP
N$5
  Bottom 0.2: R12.2 C3.1 13.3,8.35 U5.3
N$6
  Bottom 0.2: R18.1 133.5,60.9 134.35,61.75 RGB2.4
N$7
  Bottom 0.2: RGB2.3 134.95,56.25 134.2,57 132.85,57 R17.1
N$8
  Bottom 0.2: C23.1 17.3,6.95 R12.1
N$9  (via drill 0.35)
  Route2 0.2: v80.15,56.98 77.7,59.42 v77.7,60.67
  Bottom 0.2: U4.15 73.6,53.9 73.8,54.1 74.7,54.1 75.7,55.1 75.7,55.97 76.33,56.6 79.78,56.6 v80.15,56.98 | v77.7,60.67 75.71,62.66 ADC2.TP
N$10  (via drill 0.35)
  Route2 0.2: v81.2,56.8 81.2,57.08 78.9,59.38 v78.9,60.67
  Bottom 0.2: U4.16 74.35,53.7 74.87,53.7 76.1,54.93 76.1,55.8 76.5,56.2 80.6,56.2 v81.2,56.8 | v78.9,60.67 78.11,61.47 ADC1.TP
N$11
  Bottom 0.2: RGB1.3 126.1,56.25 R2.2
N$12
  Bottom 0.2: R3.2 124.5,59 127.25,61.75 RGB1.4
N$14
  Bottom 0.2: J3.2 82.1,46.8 D1.A 84.75,45.9 Q5.3
N$16
  Bottom 0.2: R39.1 123,58.8 126.9,62.7 128.9,62.7 129.55,62.05 129.55,61.95 RGB1.1
N$17
  Bottom 0.2: RGB2.1 138.85,61.75 140,60.6 R26.1
N$26
  Bottom 0.2: U3.5 28.2,31.7 28,31.5 | 28,31.5 | 28,31.5 28,30.35 R6.2 R8.1
N$43
  Bottom 0.3: R40.2 113.55,58.7 113.55,56.78 113.75,56.58 U11.10
N$44
  Bottom 0.3: C40.2 114.61,48.79 114.48,48.79 114.28,48.99 114.28,50.62 113.75,51.15 U11.21
N$45  (via drill 0.35)
  Route2 0.2: v102.5,48 102.5,50.1 110.4,58 113.63,58 v114.43,57.2
  Bottom 0.2: U11.11 114.26,57.03 v114.43,57.2 | v102.5,48 102.5,45.65 R36.2 R37.1 102.65,40.59 BAT_THERM.2
N$47  (via drill 0.35)
  Bottom 0.2: R38.1 140.15,42.85 142.5,40.5 142.5,18.6 140.4,16.5 129.1,16.5 U$18.GND4
  other vias: 124.6,12
N$50
  pour Bottom (no thermals): 114.2,52.3 114.2,51.1 114.6,50.7 114.6,49.3 114.8,49.1 115.5,49.1 115.7,48.9 115.7,45.9 115.9,45.7 117.6,45.7 117.8,45.9 117.8,49.9 117.4,50.3 116.3,50.3 115.8,50.8 115.8,51.5 115,52.3
N$937591
  Bottom 0.3: U11.23 112.74,51.44 111.25,49.95 C12.1
  Bottom 1: C12.1 C37.1 111.25,46.75 110.5,46 108.06,46 108.02,46.04 107.1,46.04 107.06,46 107,46 106,47 SJ1.1
OUT+
  Bottom 0.2: J1.1 10.38,10.97 U5.6
OUT-
  Bottom 0.2: J1.2 11.62,11.93 U5.1
REGN  (via drill 0.35)
  Route2 0.2: v113.1,50.7 108.4,46 107,46 v105.5,44.5
  Bottom 0.2: 113.15,49.9 113.15,49.4 C43.1 v113.1,50.7 | R37.2 105,44 v105.5,44.5
  Bottom 0.3: U11.22 113.24,49.99 113.15,49.9
SD_CS  (via drill 0.35)
  Route2 0.2: v72.2,38 71.8,38.4 71.8,42.1 67.6,46.3 56.4,46.3 55.1,47.6 v52.9,47.6
  Bottom 0.2: v52.9,47.6 52.6,47.9 51.5,47.9 51.1,47.9 48.3,50.7 48.3,54.84 X1.2 | v72.2,38 71.86,38.34 STM32H750.77
SD_DETECT  (via drill 0.35)
  Route2 0.2: v51.2,42.5 53.3,40.4 57.4,40.4 58.7,39.1 v58.7,39
  Bottom 0.2: v51.2,42.5 50.44,42.5 44.35,48.59 X1.CD2 | v58.7,39 59,39 59.81,39.81 STM32H750.58
SD_SPI_MISO  (via drill 0.35)
  Route2 0.2: v53,44.4 53.1,44.5 64.6,44.5 69.6,39.5 69.6,34.1 71.7,32 v72.7,32
  Bottom 0.2: X1.7 38.75,57.05 43.4,52.4 44,52.4 51.9,44.5 52.3,44.5 52.9,44.5 v53,44.4 | v72.7,32 72.54,31.84 STM32H750.90
SD_SPI_MOSI  (via drill 0.35)
  Route2 0.2: v52.2,28.9 52.2,33.4 52.5,33.7 52.5,35.6 51.2,36.9 51.2,40.6 43.8,48 v43.8,56.1
  Bottom 0.2: v52.2,28.9 52.64,29.34 STM32H750.31 | v43.8,56.1 43.8,57.14 43.15,57.79 X1.3
SD_SPI_SCLK  (via drill 0.35)
  Route2 0.2: v52.62,46.1 53.12,46.1 53.73,45.5 65.2,45.5 70.6,40.1 70.6,35.1 72.7,33 73.3,33 v73.7,32.6
  Bottom 0.2: STM32H750.89 71.94,32.34 72.4,32.8 73.5,32.8 v73.7,32.6 | v52.62,46.1 51.9,46.1 51.6,46.1 44.5,53.2 43.7,53.2 40.95,55.95 X1.5
SWA  (via drill 0.3)
  Top 0.2: v72.1,35.1 73.03,35.1 73.92,34.2 81,34.2 82.6,32.6 125.55,32.6 131.35,38.4 v134.95,38.4
  Route2 0.2: ABXY.A 136.55,40 v134.95,38.4
  Bottom 0.2: STM32H750.83 71.86,35.34 v72.1,35.1
  other vias: 141.35,40
SWB  (via drill 0.3)
  Top 0.2: v126.55,32.2 82.44,32.2 80.84,33.8 73.34,33.8 v72.8,34.34
  Route2 0.2: ABXY.B 132.7,32.2 v126.55,32.2
  Bottom 0.2: v72.8,34.34 STM32H750.85 | v72.8,34.34
  other vias: 132.75,31.9
SWCLK  (via drill 0.35)
  Route2 0.2: v77,40.5 77,41.2 85.6,49.8 v90,49.8
  Bottom 0.2: STM32H750.76 75.34,38.84 v77,40.5 | v90,49.8 90.7,50.5 90.7,52.57 JP1.B6
SWDIO  (via drill 0.35)
  Route2 0.2: v76.6,42.7 84.8,50.9 v84.8,52.1
  Bottom 0.2: STM32H750.72 66.81,39.78 67.2,39.4 74,39.4 76.6,42 v76.6,42.7 | JP1.B8 85.6,52.9 v84.8,52.1
SWHOME  (via drill 0.35)
  Route2 0.2: 89.3,20.6 v80.6,20.6 80.6,23.8 80.6,27.88 v79.4,29.07 | 89.3,20.6 99.9,31.2 99.9,48.9 109.8,58.8 114.4,58.8 115.5,57.7 v115.5,56.6 | U$18.HOME 119.4,20.6 89.3,20.6
  Bottom 0.2: v80.6,20.6 74.95,20.6 R5.1 | U11.12 115.36,56.6 v115.5,56.6 | STM32H750.88 71.24,32.84 72,33.6 78.4,33.6 79.4,32.6 v79.4,29.07
  other vias: 128,12
SWMENU  (via drill 0.3, 0.35)
  Top 0.2: v68.4,34.14 69.94,32.6 71.8,32.6 72.6,33.4 75,33.4 80.6,33.4 82.2,31.8 119.4,31.8 v132.8,18.4
  Route2 0.2: v132.8,18.4 138,13.2 U$18.MENU
  Bottom 0.2: v68.4,34.14 68.7,33.84 STM32H750.86
  other vias: 138,12
SWX  (via drill 0.3, 0.35)
  Top 0.2: v132.75,48.15 ABXY.X | v130.95,41.8 130.95,38.6 126.55,34.2 120.95,34.2 120.15,33.4 82.97,33.4 80.43,35.94 v73.3,35.94
  Route2 0.2: v132.75,48.15 130.95,46.35 130.95,43 | 130.95,43 v130.95,41.8 | 130.95,43 115.5,43 112.4,39.9 103.7,39.9 v101.7,41.9
  Bottom 0.2: STM32H750.81 72.9,36.34 v73.3,35.94 | v101.7,41.9 101.2,42.4 R1.1 100.35,44.75 98.75,44.75 97.8,45.7 U1.1
SWY  (via drill 0.3, 0.35)
  Top 0.2: v121.35,33.4 120.95,33 82.8,33 80.59,35.2 v74,35.2
  Route2 0.2: ABXY.Y 121.35,37.2 v121.35,33.4 107.9,33.4 v101.7,39.6
  Bottom 0.2: STM32H750.82 72.37,35.84 73,35.2 v74,35.2 | v101.7,39.6 99.6,41.7 R13.1 98.35,43.9 97.5,44.75 U1.2
  other vias: 124.15,40
USB_5V  (via drill 0.7, 0.8)
  Route2 1.5: v51.5,57.6 54.8,57.6 57,55.4 59.2,55.4 61.9,58.1 71.3,58.1 72.2,59 75.1,59 80.2,53.9 88.1,53.9 90.4,51.6 99.7,51.6 102.5,54.4 v102.5,55
  Bottom 0.2: v51.5,57.6 50.2,57.6 50.1,57.5 50.1,52.35 51.1,51.35 R21.1 | 55.9,59.1 56.2,59.4 U$3.VBUS
  Bottom 1: C39.1 108.9,52.05 108.9,51.71 108.19,51 106.48,51 SJ1.2 105.3,51.22 105.3,54.2 104.5,55 v102.5,55 | 55.9,59.1 55.9,58 51.9,58 v51.5,57.6
  pour Bottom (no thermals): 112.3,52.4 112.3,51.7 112.1,51.5 111.8,51.2 110.2,51.2 109.3,51.2 108.7,51.8 108.7,53.1 108.8,53.2 110.1,53.2 110.4,52.9 110.5,52.8 111.8,52.8 111.8,52.5 111.9,52.4
USB_DFU_DM  (via drill 0.35)
  Route2 0.2: v59,49.1 v59,51.3
  Bottom 0.2: U8.13 56.12,52.92 55.75,52.55 | U8.5 55.48,52.27 55.75,52.55 | STM32H750.70 65.81,41.31 65.92,41.41 65.92,45.42 62.23,49.1 v59,49.1 | v59,51.3 57,51.3 55.75,52.55
USB_DFU_DP
  Bottom 0.2: STM32H750.71 66.31,45.59 61.71,50.19 U8.1
USB_DM
  Bottom 0.2: U$3.DM 56.85,55.87 U8.14 56.77,54.02 57.9,52.9 61.6,52.9 67.4,58.7 95.2,58.7 97,56.9 106.1,56.9 109.25,53.75 U11.3
USB_DP  (via drill 0.35)
  Route2 0.2: v65.1,55.2 v62.7,55.2
  Bottom 0.2: U$3.DP 57.42,60.27 U8.15 57.42,53.94 58.07,53.3 60.8,53.3 v62.7,55.2 | U11.2 110.76,53.24 110.65,53.35 109.09,53.35 105.93,56.5 96.83,56.5 95.03,58.3 68.2,58.3 v65.1,55.2
USB_ID  (via drill 0.35)
  Route2 0.2: v58.3,57.9 57.1,59.1 48.8,59.1 48.2,58.5 48.2,51.3 51.2,48.3 51.2,44.3 53.7,41.8 v55.4,41.8
  Bottom 0.2: U$3.ID 58.15,58.05 v58.3,57.9 | v55.4,41.8 56.31,40.88 STM32H750.51
USB_MAIN_DM  (via drill 0.35)
  Route2 0.2: v55,53.8 56.5,52.3 v56.5,48.3
  Bottom 0.2: STM32H750.53 57.31,41.81 57.41,41.91 57.41,47.3 57.41,47.38 v56.5,48.3 | U8.12 55.48,54.27 v55,53.8
USB_MAIN_DP
  Bottom 0.2: STM32H750.54 57.81,48.48 57.42,48.88 U8.2
USB_SWAP  (via drill 0.35)
  Top 0.2: v58.9,47.5 56.1,47.5 52.8,50.8 52.8,54.8 v52.7,54.9
  Bottom 0.2: U8.11 U8.10 U8.9 51.76,55.8 R29.1 52.65,54.9 v52.7,54.9 | STM32H750.55 58.31,42.31 58.7,42.7 58.7,47.3 v58.9,47.5
USER_LEFT1  (via drill 0.35)
  Top 0.2: v60.58,26.38 57.58,26.38 57.3,26.1 49.9,26.1 36.7,39.3 6.2,39.3 4.4,41.1 4.4,51.6 v2,54
  Bottom 0.2: STM32H750.16 60.81,26.14 v60.58,26.38 | v2,54 1.73,53.73 USER_LEFT1.TP
USER_LEFT2  (via drill 0.35)
  Top 0.2: v64.92,23.66 61.26,20 45.2,20 39.3,25.9 39.3,33.2 34,38.5 5.8,38.5 3.6,40.7 3.6,46.3 v3,46.9
  Bottom 0.2: STM32H750.8 64.81,23.77 v64.92,23.66 | USER_LEFT2.TP 2.8,48.66 2.8,47.1 v3,46.9
USER_RIGHT1  (via drill 0.35)
  Top 0.2: v61.03,23.83 61.83,24.63 67.33,24.63 71.1,28.4 77.1,28.4 77.7,27.8 91,27.8 93,25.8 102.5,25.8 v104.3,27.6
  Route2 0.2: v104.3,27.6 105.6,26.3 135.3,26.3 147,38 147,54 v146.8,54.2
  Bottom 0.2: STM32H750.17 60.31,24.18 60.4,24.1 60.76,24.1 v61.03,23.83 | v146.8,54.2 146.8,53.74 USER_RIGHT1.TP
USER_RIGHT2  (via drill 0.35)
  Top 0.2: v65,26.31 65.31,26.31 69.3,30.3 71,30.3 | 71,30.3 | 71,30.3 91.7,30.3 94.2,27.8 98.2,27.8 101.2,30.8 105.7,30.8 v107.5,29
  Route2 0.2: v107.5,29 121.5,29 138.8,46.3 v145.6,46.3
  Bottom 0.2: STM32H750.9 64.31,26.02 64.61,26.31 v65,26.31 | v145.6,46.3 147.1,47.8 147.1,48.56 USER_RIGHT2.TP
VBAT
  Bottom 0.2: CN1.1 141.7,45 | 141.7,45 141.7,43.65 R38.2 | 141.7,45 139.85,45 R10.1
  Bottom 1: CN1.1 136,48 133,51 128,51 124.05,54.95 118.2,54.95 C44.1
  pour Bottom (no thermals): 115.1,54.7 116.9,54.7 117.1,54.5 118.9,54.5 118.9,55.8 118.8,55.9 115.6,55.9 115.1,55.4
VCC  (via drill 0.35, 0.6)
  Route2 0.2: v112,61.5 112,60.5
  Route2 1: v122.6,53.3 122.8,53.3 123.6,54.1 123.6,55.4 120.5,58.5 117,58.5 115,60.5 113.2,60.5 112,60.5 97.5,60.5 96.2,61.8 72.2,61.8 71,63 65.5,63 62.9,60.4 40.9,60.4 40.1,59.6 38.6,59.6 36,57 36,43.6 | 36,43.6 36,41 33.9,38.9 26.9,38.9 24,36 v24,33 17.7,33 16.1,31.4 16.1,27.3 14.5,25.7 10.2,25.7 6.8,22.3 v6.8,11.3 | 36,43.6 38.9,43.6 v39.1,43.4
  Bottom 0.2: v122.6,53.3 120.05,53.3 C42.1 | U11.8 112.74,57 112.74,57.64 113,57.9 113,60.5 v112,61.5
  Bottom 0.5: U3.6 29.1,36.2 L2.1 | 26.85,32.7 26.6,32.7
  Bottom 0.6: U5.5 9.4,9.5 C14.1 7.25,9.1 C36.1
  Bottom 0.65: U6.3 43.3,45.1 42.4,46 40.7,46 39.1,44.4 v39.1,43.4 40.05,42.45 C22.1
  Bottom 0.7: U6.1 41.6,42.35 C22.1
  Bottom 1: v24,33 26.35,33 C28.1 | C36.1 7,11.1 v6.8,11.3
  pour Bottom (no thermals): 25.8,32.3 29.8,32.3 29.8,38.5 28.4,38.5 28.7,37.8 25.8,33.9
  pour Bottom (no thermals): 119.5,45.8 122.1,45.8 122.7,46.4 122.7,53.7 122.3,54.1 116.9,54.1 116.7,54.3 115.1,54.3 115.1,53.7 116,53.7 116.6,53.1 117,52.7 117.7,52.7 120.8,52.7 121.1,52.4 121.1,50.8 120.7,50.4 119.5,50.4 119.3,50.2 119.3,46
VIBE_EN  (via drill 0.35)
  Route2 0.2: v82.2,36.3 90.55,44.65 v91.7,44.65
  Bottom 0.2: STM32H750.92 71.76,30.84 73.4,29.2 77.4,29.2 78.3,28.3 80.3,28.3 82.2,30.2 v82.2,36.3
  Bottom 1: Q5.1 89.9,45.7 R24.1 90.75,45.6 v91.7,44.65
XTAL_IN
  Bottom 0.2: STM32H750.12 62.74,25.02 62.74,23.88 61.7,22.83 61.7,20.5 62.4,19.8 U$19.3 64.28,18.32 C24.2
XTAL_OUT
  Bottom 0.2: STM32H750.13 62.31,24.02 60.6,22.3 U$19.1 59.9,21.4 59.4,20.9 59.4,18.48 C35.2

## Text on the board
bPlace: v1.3
Measures: R3.00 | ⌀2.75